# Altium PCB CANduino.PcbDoc
Units mm, origin at the board's own origin, x right, y up, seen from the top; angles counter-clockwise.
Board outline 43 x 30.5 mm, 4 copper layers (Top Layer, GND, PWR, Bottom Layer), stack 1.566 mm thick; 43 components, 51 nets, 212 pads, 142 vias.
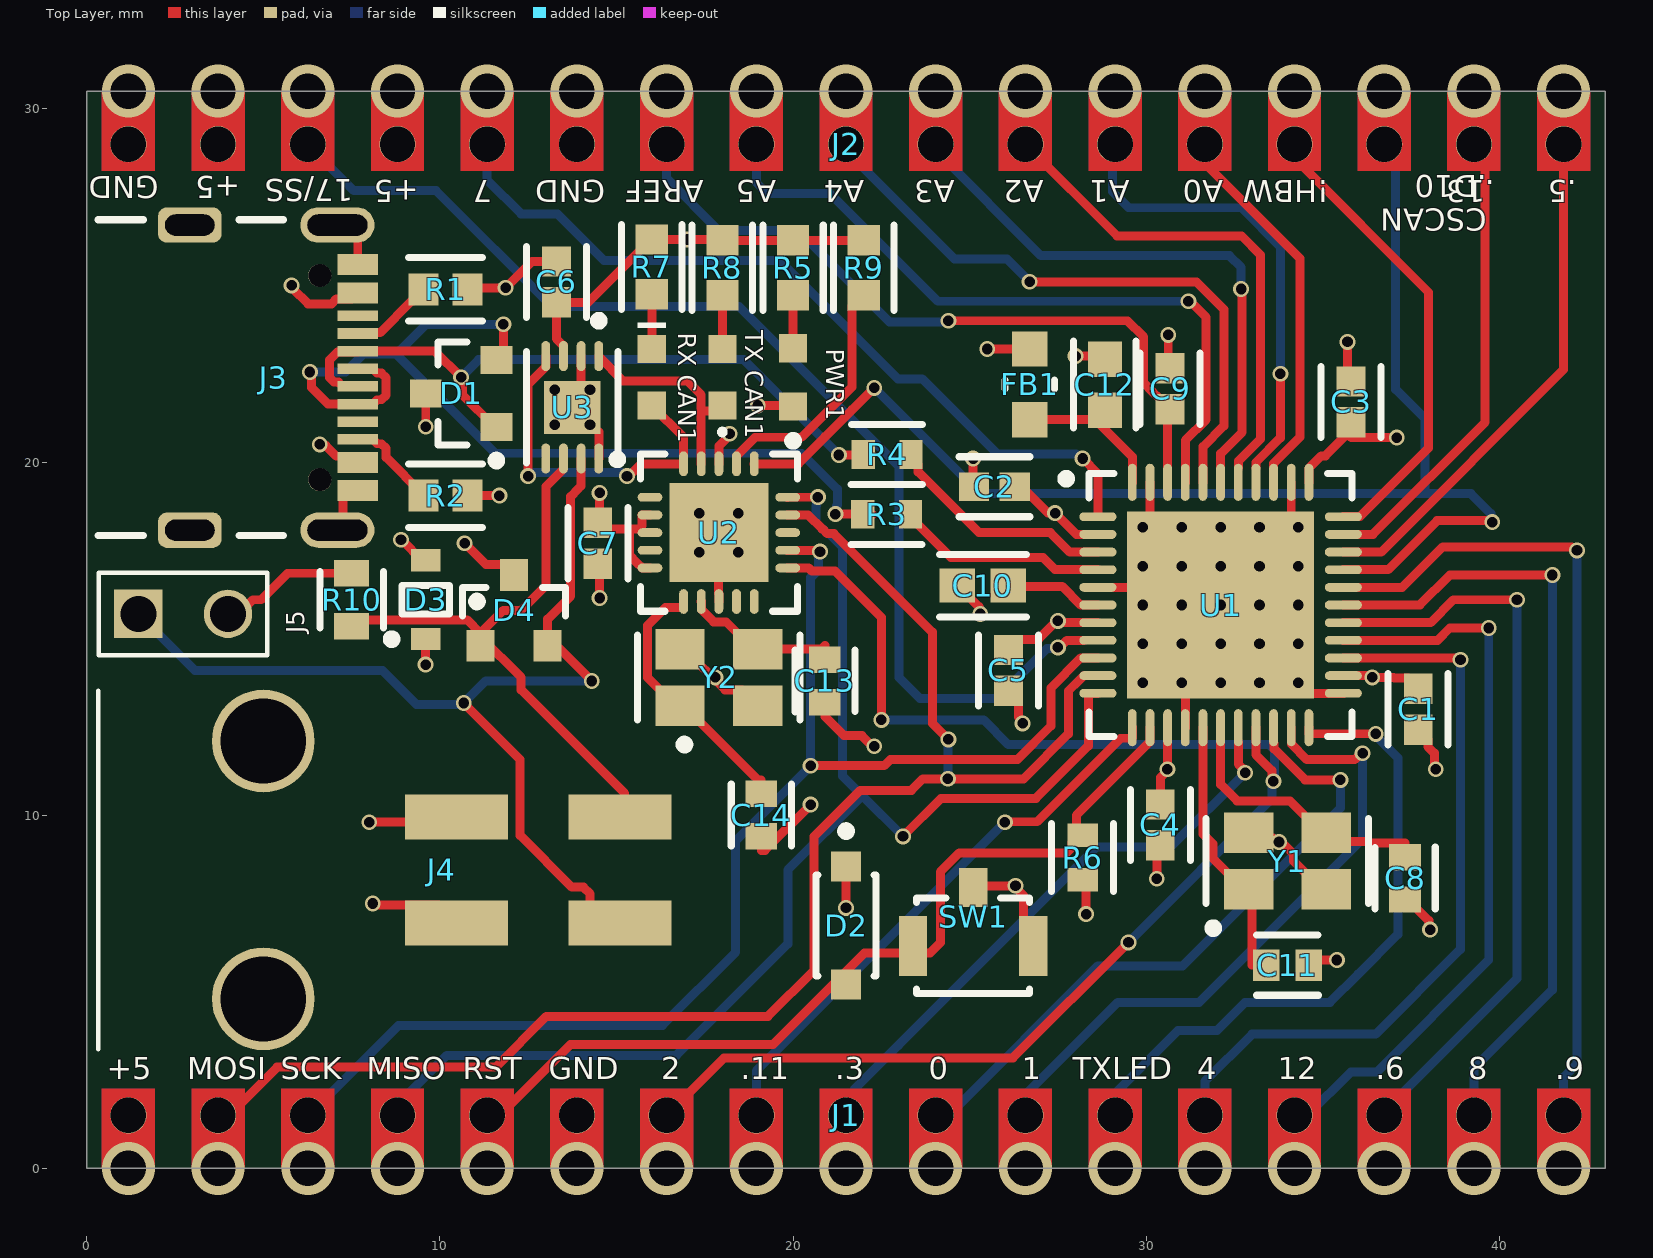
[diagram p0: Top Layer view]
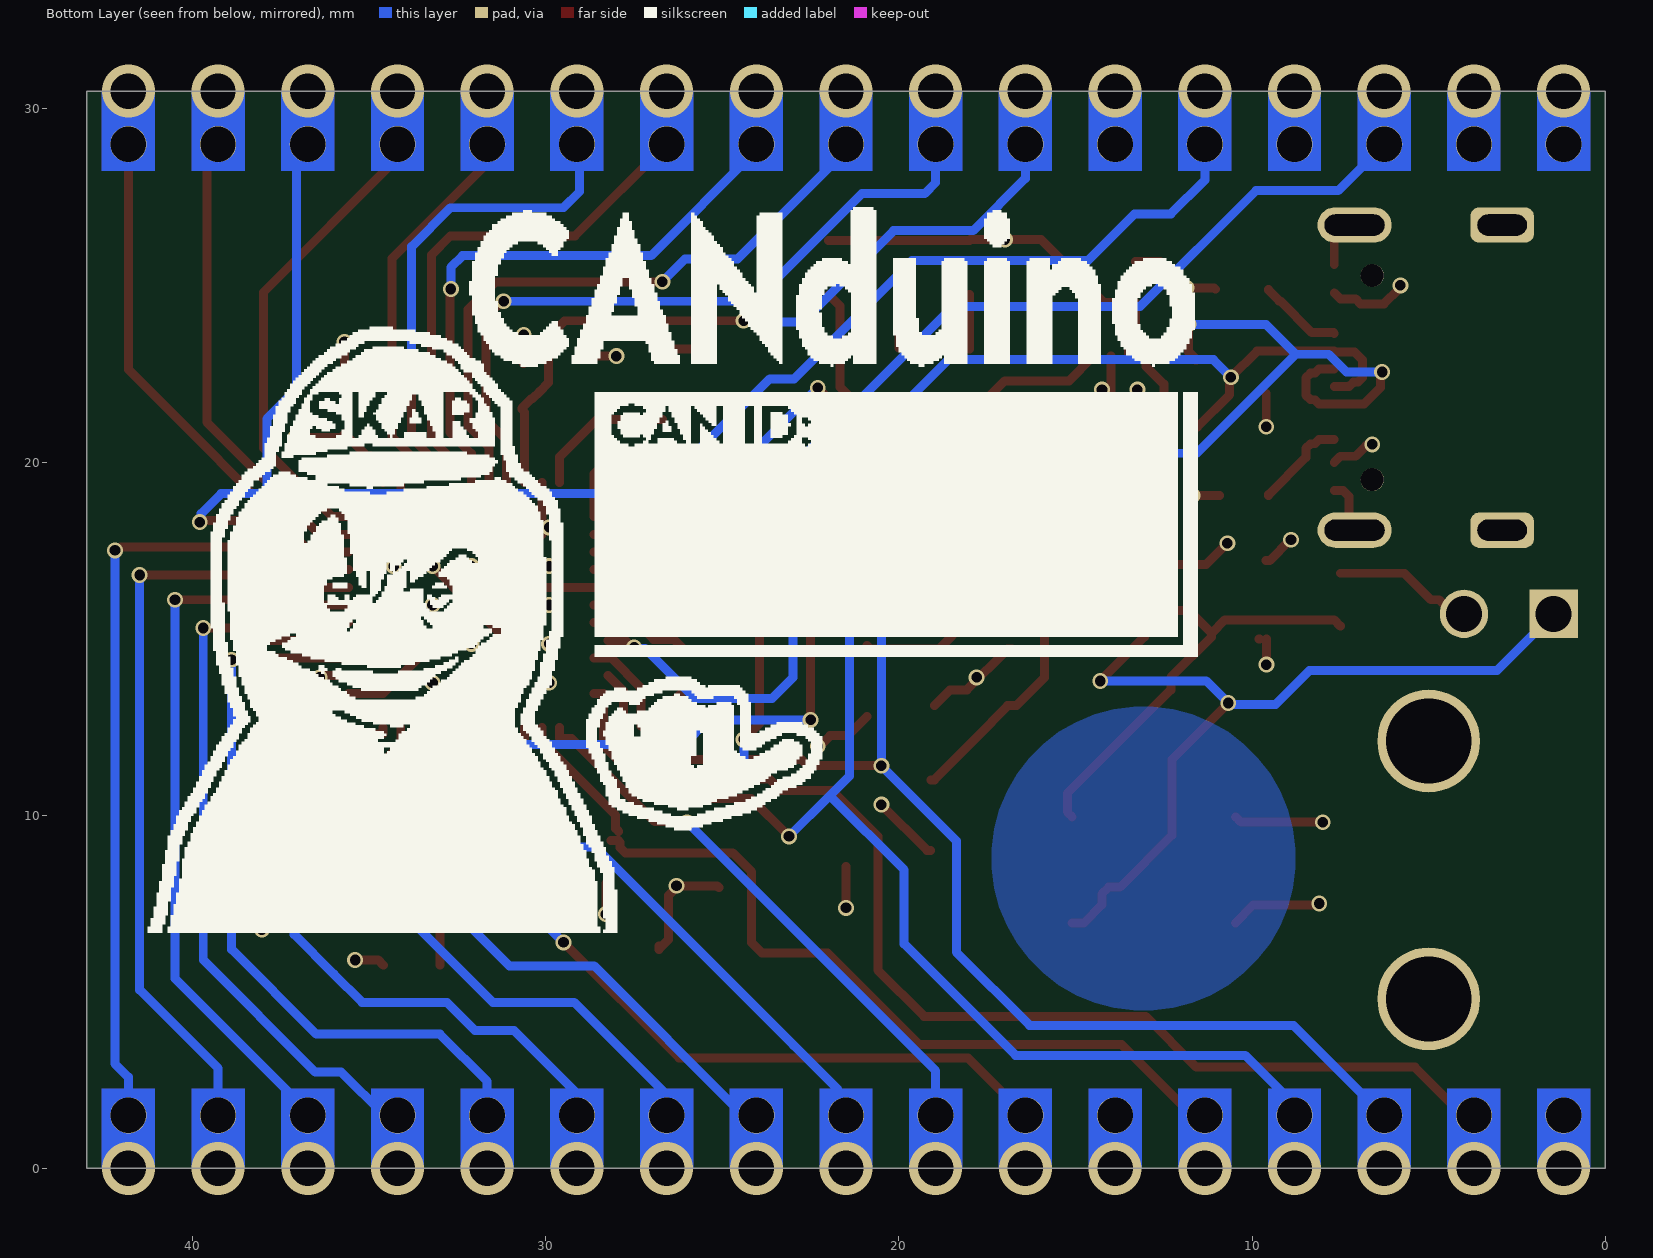
[diagram p1: Bottom Layer view, seen from below]
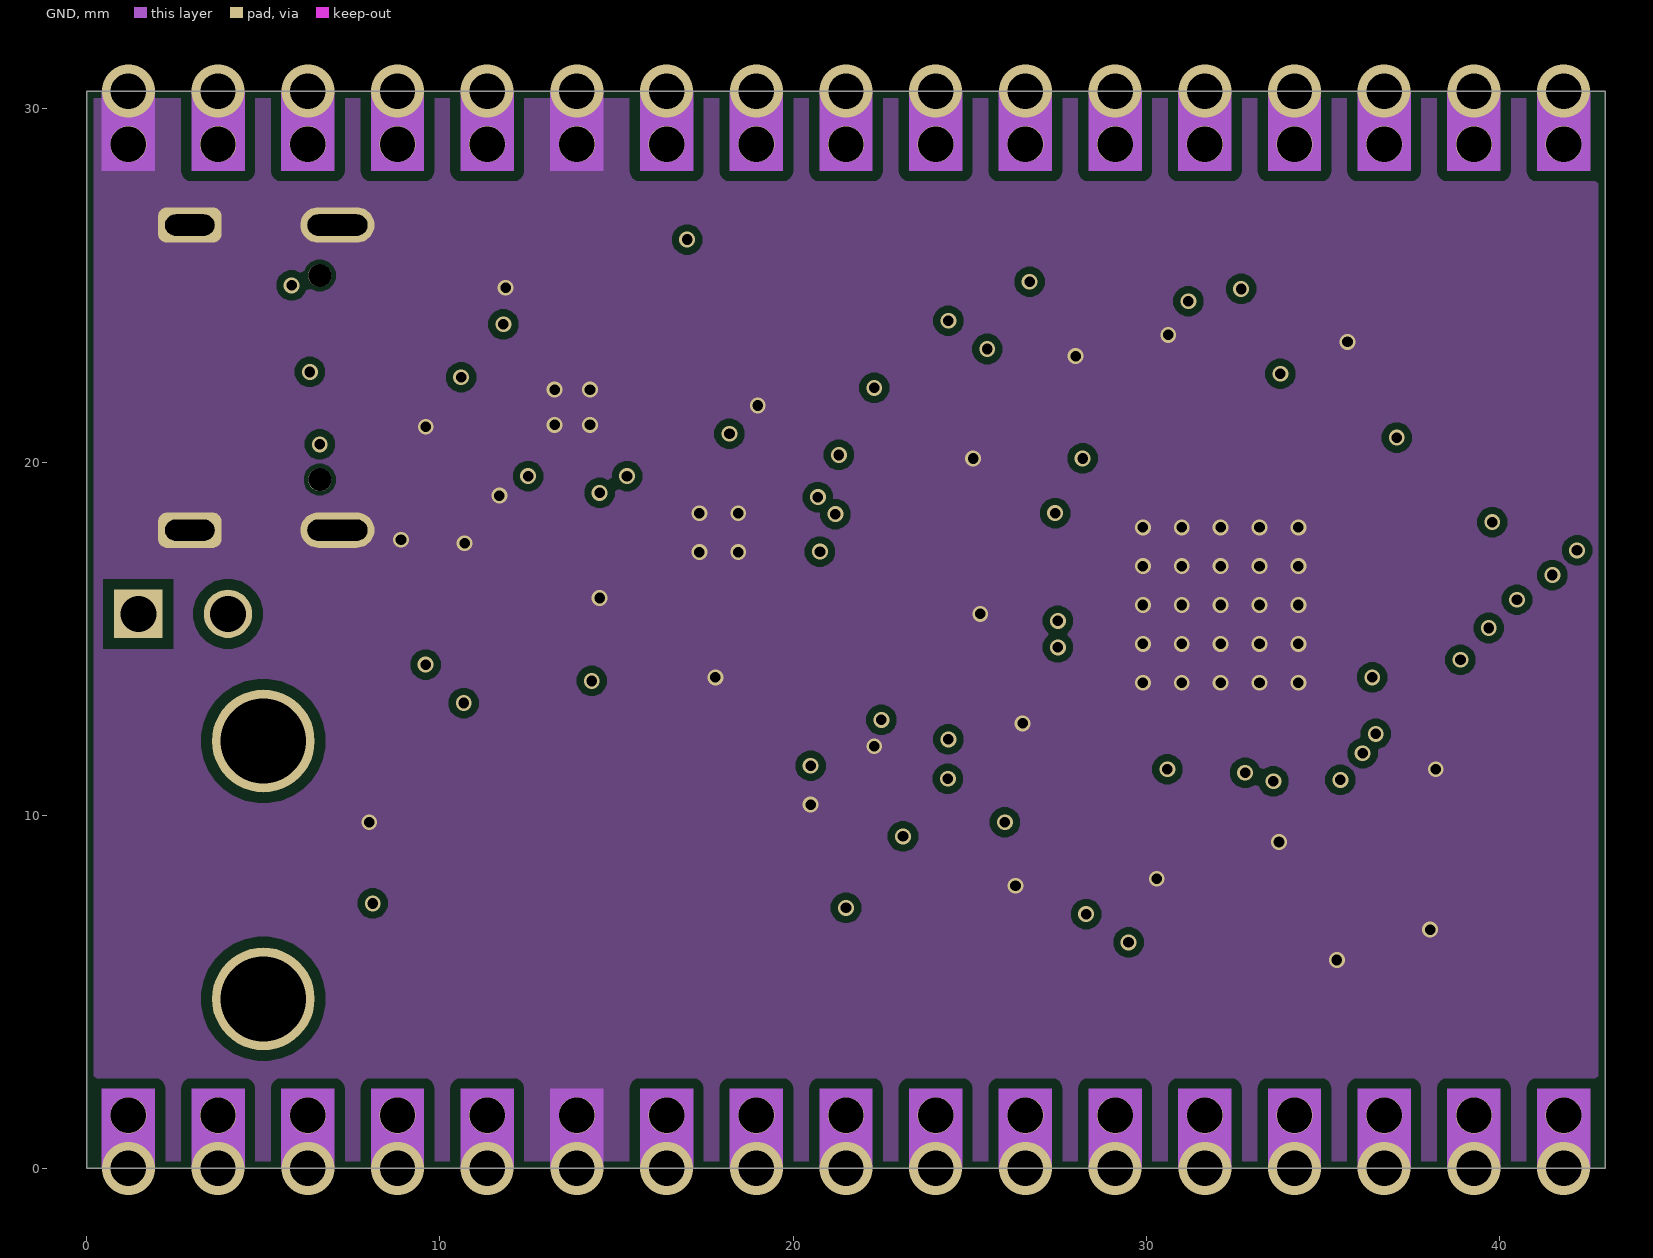
[diagram p2: GND]
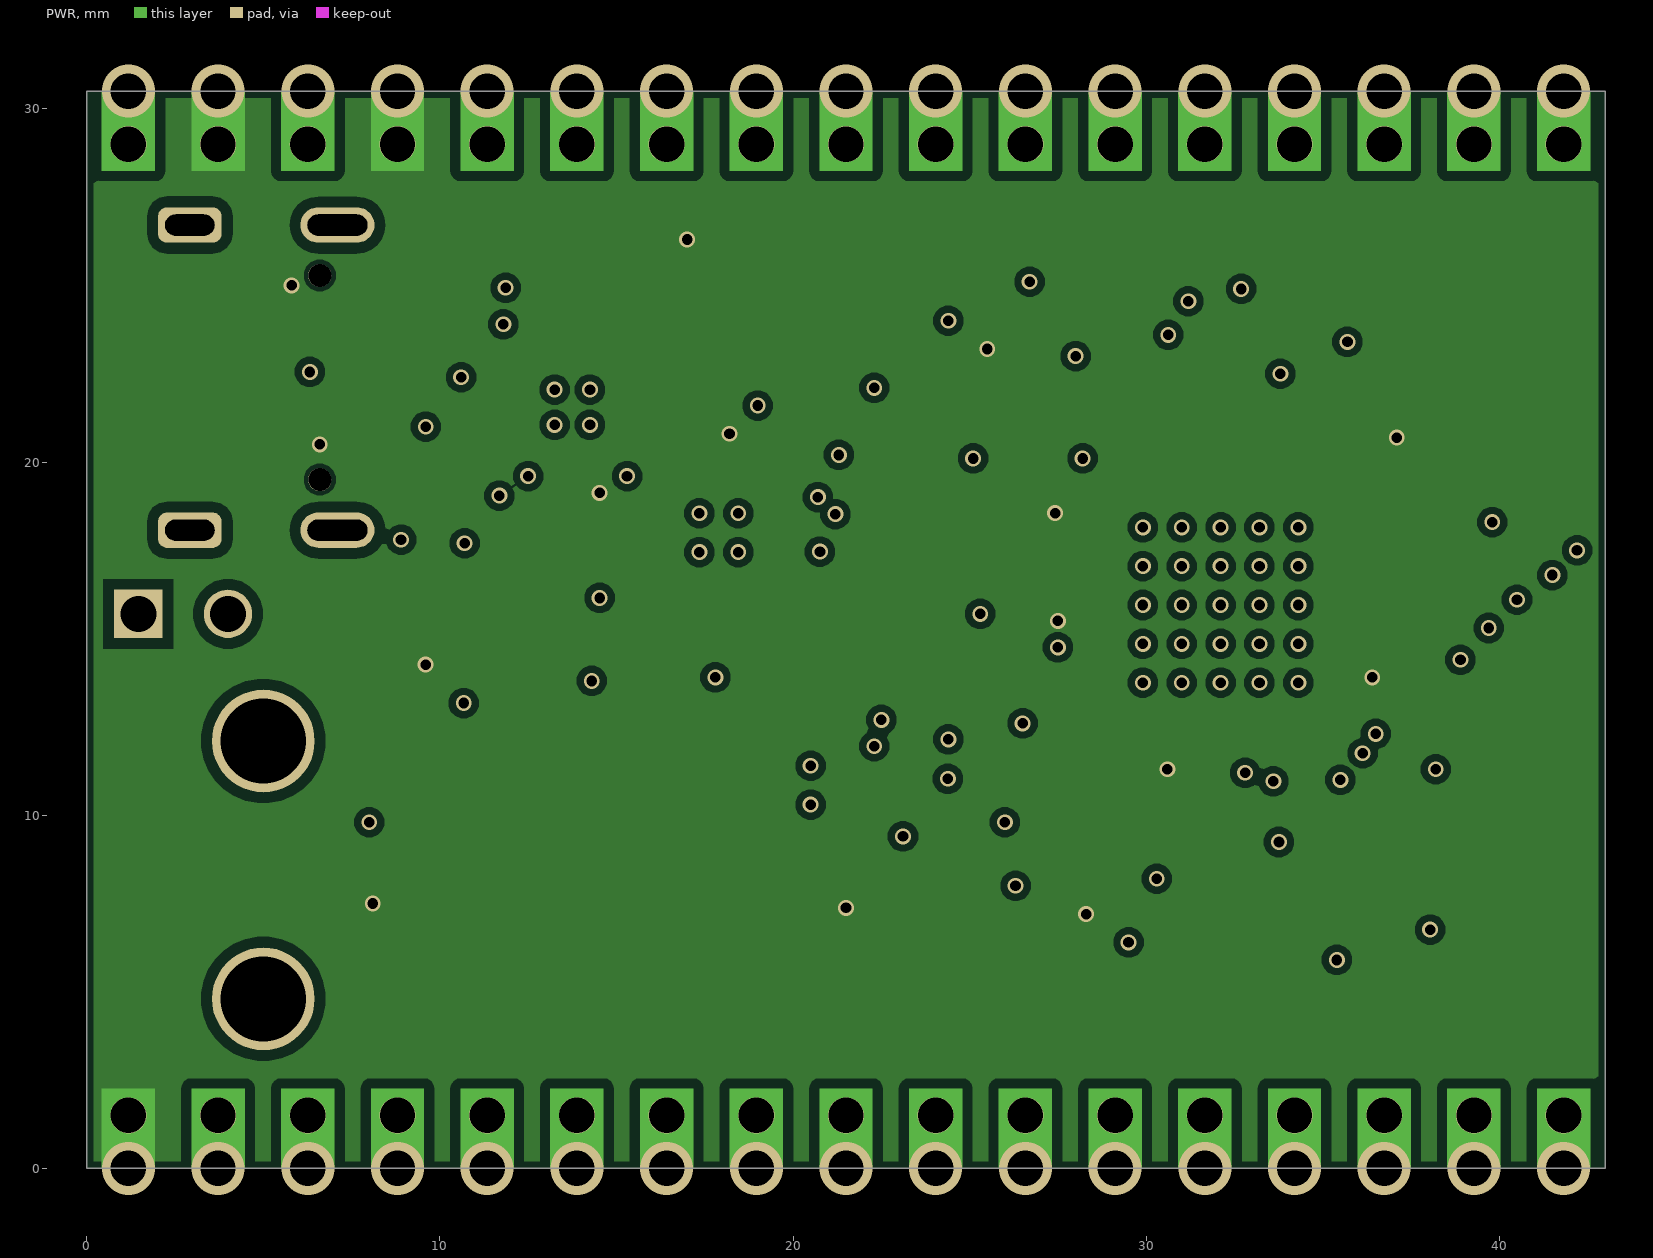
[diagram p3: PWR]
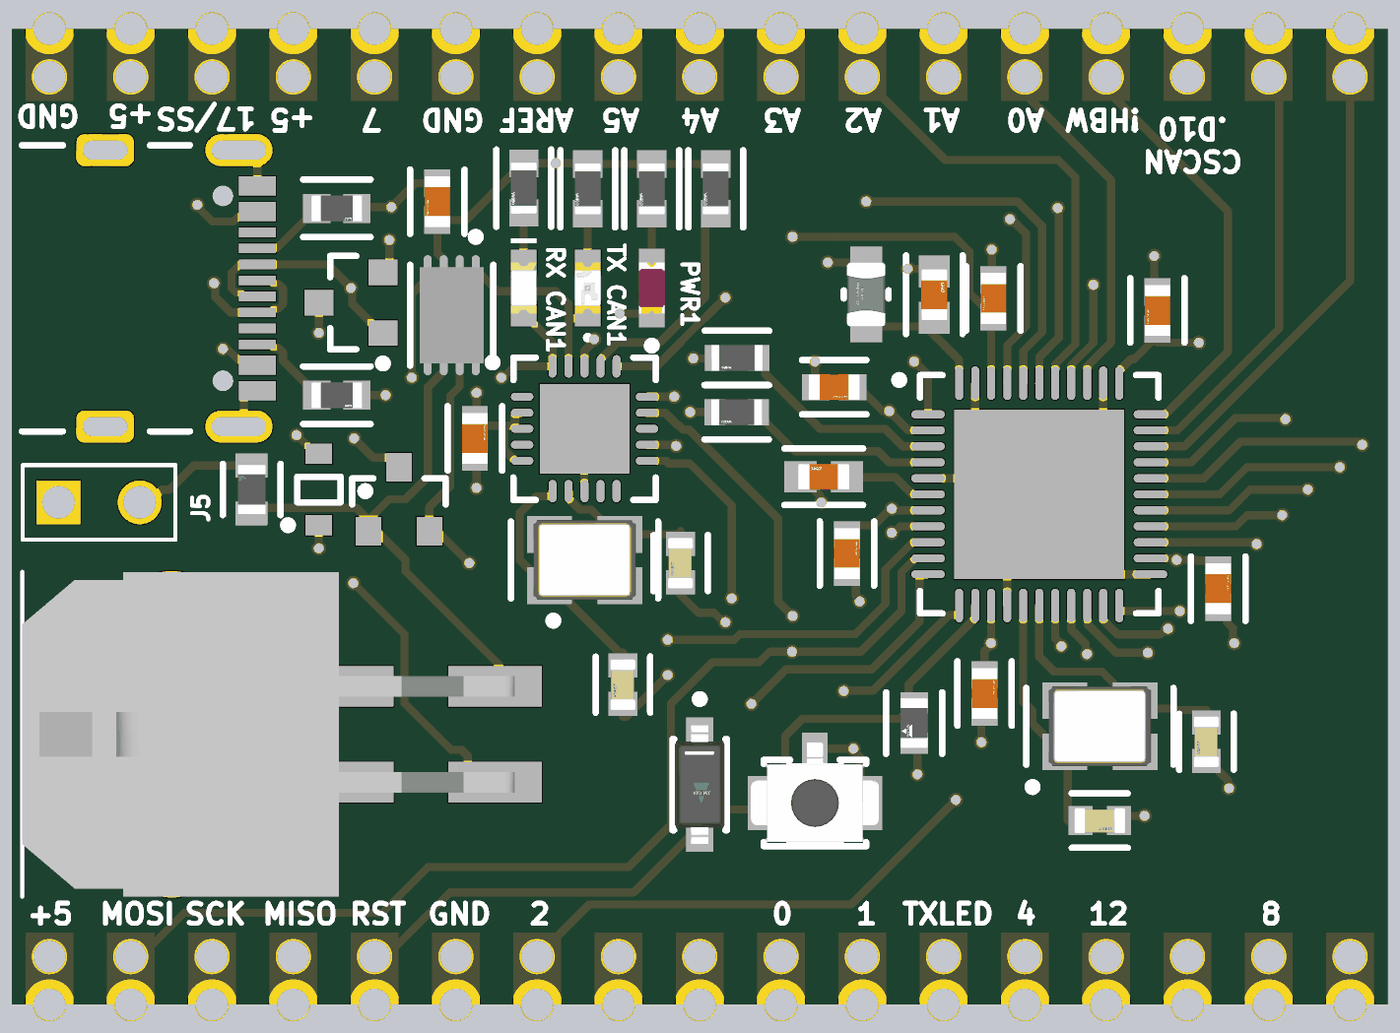
[diagram p4: 3D render of the assembled board from above, using the file's embedded part models]

## Layer stack, top to bottom
Top Solder: solder mask 0.0102, Solder Resist, Dk 3.5
Top Layer: signal copper 0.035
Dielectric 2: prepreg 0.203, PP-006, Dk 4.1
GND: signal copper 0.03
Dielectric 1: dielectric 1.03, FR-4, Dk 4.8
PWR: signal copper 0.03
Dielectric 3: prepreg 0.203, PP-006, Dk 4.1
Bottom Layer: signal copper 0.035
Bottom Solder: solder mask 0.0102, Solder Resist, Dk 3.5

## Board outline
0,0 0,30.5 43,30.5 43,0

## Design rules (kind name [scope] priority, off if disabled: settings)
BoardOutlineClearance [All] p1: gap=0.2 ignorepadtopadclearanceinfootprint=FALSE
Clearance [All] p1: gap=0.12 ignorepadtopadclearanceinfootprint=FALSE except(0.1: Arc-SMDPad Track-SMDPad; 0.15: SMDPad-SMDPad; 0.2: Arc-Via Track-Via Via-Fill Via-Poly Via-Region Via-Hole; 0.3: THPad-Fill THPad-Poly THPad-Region; 0.35: Arc-THPad Track-THPad)
ComponentClearance [All] p1: gap=0.01 collisioncheckmode=3 verticalgap=0.01 showdistances=FALSE
HoleSize [All] p1: absolutevalues=TRUE maxlimit=6.3 minlimit=0.15 maxpercent=80.000 minpercent=20.000
MinimumAnnularRing [All] p1: minimumring=0.025
MinimumSolderMaskSliver [All] p1: minsoldermaskwidth=0.1
PolygonConnect [All] p1: connectstyle=Direct reliefconductorwidth=0.254 reliefentries=4 polygonreliefangle="90 Angle" airgapwidth=0.254
RoutingVias [All] p1: holewidth=0.3 width=0.45 viastyle="Through Hole" minholewidth=0.15 minwidth=0.25 maxholewidth=1.5 maxwidth=2
SilkToSolderMaskClearance [IsPad] p1: minsilkscreentomaskgap=0.15 clearancetoexposedcopper=TRUE
SolderMaskExpansion [All] p1: expansion=0.038 istentingtop=FALSE
SupplyNets "Schematic Supply Nets_2" [InNet('GND')] p1: voltage=0.000
SupplyNets "Schematic Supply Nets" [InNet('+5')] p2: voltage=0.000
Width [All] p1: maxlimit=0.254 minlimit=0.16 preferedwidth=0.254 midlayer1_minwidth=0.254 midlayer2_minwidth=0.254 minimp=50.000000 maximp=50.000000 favimp=50.000000
26 further rules are at their usual default settings.

## Components (designator, comment, footprint, x,y, rotation, side; value= is the part's Value field where it differs from the comment)
C1 "100nF" FP-0603-L_1_6_0_1-W_0_8_0-IPC_C 37.7,13 r270 top
C2 "100nF" FP-0603-L_1_6_0_1-W_0_8_0-IPC_C 25.7,19.3 r180 top
C3 "100nF" FP-0603-L_1_6_0_1-W_0_8_0-IPC_C 35.8,21.7 r90 top
C4 "100nF" FP-0603-L_1_6_0_1-W_0_8_0-IPC_C 30.4,9.723 r270 top
C5 "100nF" FP-0603-L_1_6_0_1-W_0_8_0-IPC_C 26.1,14.1 r270 top
C6 "100nF" FP-0603-L_1_6_0_1-W_0_8_0-IPC_C 13.3,25.1 r90 top
C7 "100nF" FP-0603-L_1_6_0_1-W_0_8_0-IPC_C 14.475,17.7 r270 top
C8 "C0603C180K4HACTU" FP-C0603C-CF-MFG 37.332,8.212 r90 top value="18 pF"
C9 "100nF" FP-0603-L_1_6_0_1-W_0_8_0-IPC_C 30.675,22.075 r90 top
C10 "0603YD105KAT2A" FP-0603-L_1_6_0_15-W_0_81-IPC_B 25.374,16.5 r180 top
C11 "C0603C180K4HACTU" FP-C0603C-CF-MFG 34,5.75 r180 top value="18 pF"
C12 "0603YD105KAT2A" FP-0603-L_1_6_0_15-W_0_81-IPC_B 28.831,22.19 r90 top
C13 "C0603C180K4HACTU" FP-C0603C-CF-MFG 20.9,13.8 r90 top value="18 pF"
C14 "C0603C180K4HACTU" FP-C0603C-CF-MFG 19.1,10 r90 top value="18 pF"
D1 "SM05T1G" ONSC-SOT-23-3-318-08_V 10.601,21.941 r180 top
D2 "1N4148W-G3-08" FP-S8-V-3910_01-001-MFG 21.5,6.875 r270 top
D3 "SZMM3Z5V1T1G" ONSC-SOD-323-2-477-02_V 9.6,16.1 r90 top
D4 "SM05T1G" ONSC-SOT-23-3-318-08_V 12.1,15.8 r90 top
FB1 "MH2029-300Y" FP-MH2029-MFG 26.7,22.2 r270 top value=30Ω
J1 "CastellatedSocket" Castellatedsocket 41.82,0 r90 top
J2 "CastellatedSocket" Castellatedsocket 1.18,30.5 r270 top
J3 "USB4105GFA060" GCT_USB4105GFA060 2.92,22.39 r270 top
J4 "43045-0406" 43045-04YY_060708_1 12.785,8.45 r270 top
J5 "3-644456-2" TE_3-644456-2 1.46,15.7 r0 top
PWR1 "SML-D12V8WT86C" FP-SML-D12-MFG 20,22.4 r90 top
R1 "56k" FP-RR0816-IPC_C 10.16,24.892 r0 top
R2 "56K" FP-RR0816-IPC_C 10.16,19.05 r0 top
R3 "RC0603JR-0722RL" FP-RC0603-0_55-IPC_C 22.652,18.518 r180 top
R4 "RC0603JR-0722RL" FP-RC0603-0_55-IPC_C 22.665,20.215 r180 top
R5 "AC0603FR-071KL" FP-AC0603-IPC_B 20,25.5 r270 top
R6 "10k" FP-MCT0603-IPC_C 28.2,8.8 r270 top
R7 "AC0603FR-071KL" FP-AC0603-IPC_B 16,25.523 r270 top
R8 "AC0603FR-071KL" FP-AC0603-IPC_B 18,25.5 r270 top
R9 "AC0603FR-071KL" FP-AC0603-IPC_B 22,25.5 r270 top
R10 "120" FP-CRCW0603-e3-MFG 7.5,16.1 r90 top
"RX CAN1" "150060VS75003" WL-SMCW_0603_150060xx75003 16,22.4 r270 top
SW1 "B3U-1100PM" FP-B3U-1100PM-MFG 25.1,6.3 r180 top
"TX CAN1" "150060YS75020" WL-SMCW_0603_150060xx75020 18,22.4 r90 top
U1 "ATmega32U4-MU" 44PW_M 32.108,15.951 r0 top
U2 "MCP2515-I/ML" QFN-ML20_L 17.9,18 r0 top
U3 "MCP2544FDT-H/MNY" FP-C04-129-MNY-MFG 13.75,21.55 r270 top
Y1 "TSX-3225 16.0000MF18X-AC0" FP-TSX-3225-MFG 34,8.7 r0 top
Y2 "TSX-3225 16.0000MF18X-AC0" FP-TSX-3225-MFG 17.9,13.9 r0 top

## Footprints (in the part's own frame and the unit in brackets; to place one, negate y for a bottom-side part, rotate by r counter-clockwise, add the part's x,y. Pads: shape width x height; smd on the part's side, far side on the other; paste and mask are expansions set on the pad)
44PW_M [mm] "QFN, 44-Leads, Body 7x7mm, Pitch 0.5mm, Thermal Pad 5.3x5.3mm, IPC Low Density"
  oval 1.05x0.25 smd: 1(-3.475,2.5) 2(-3.475,2) 3(-3.475,1.5) 4(-3.475,1) 5(-3.475,0.5) 6(-3.475,0) 7(-3.475,-0.5) 8(-3.475,-1) 9(-3.475,-1.5) 10(-3.475,-2) 11(-3.475,-2.5) 23(3.475,-2.5) 24(3.475,-2) 25(3.475,-1.5) 26(3.475,-1) 27(3.475,-0.5) 28(3.475,0) 29(3.475,0.5) 30(3.475,1) 31(3.475,1.5) 32(3.475,2) 33(3.475,2.5)
  oval 0.25x1.05 smd: 12(-2.5,-3.475) 13(-2,-3.475) 14(-1.5,-3.475) 15(-1,-3.475) 16(-0.5,-3.475) 17(0,-3.475) 18(0.5,-3.475) 19(1,-3.475) 20(1.5,-3.475) 21(2,-3.475) 22(2.5,-3.475) 34(2.5,3.475) 35(2,3.475) 36(1.5,3.475) 37(1,3.475) 38(0.5,3.475) 39(0,3.475) 40(-0.5,3.475) 41(-1,3.475) 42(-1.5,3.475) 43(-2,3.475) 44(-2.5,3.475)
  rect 5.3x5.3 smd: 45(0,0)
  silkscreen extent -4.5,-3.73 3.73,3.73, body extent -3.57,-3.57 3.57,3.57, height 0.9
43045-04YY_060708_1 [mm]
  rect 1.27x2.92 smd: 1(1.5,-2.315) 2(-1.5,-2.315) 3(1.5,2.315) 4(-1.5,2.315)
  round 2.91 hole 2.41: 5(3.65,-7.785) 6(-3.65,-7.785)
  silkscreen extent -5.07,-12.45 5.07,-12.45, body extent -5.07,-12.46 5.07,2.93, height 8.69
Castellatedsocket [mm]
  round 1.025 hole 1: 1(1.5,0) 2(1.5,2.54) 3(1.5,5.08) 4(1.5,7.62) 5(1.5,10.16) 6(1.5,12.7) 7(1.5,15.24) 8(1.5,17.78) 9(1.5,20.32) 10(1.5,22.86) 11(1.5,25.4) 12(1.5,27.94) 13(1.5,30.48) 14(1.5,33.02) 15(1.5,35.56) 16(1.5,38.1) 17(1.5,40.64)
  Top Layer region: 2.25,39.89 1.5,39.89 0,39.89 0,39.89 0,41.39 2.25,41.39 2.25,41.39
  Top Layer region: 2.25,37.35 1.5,37.35 0,37.35 0,37.35 0,38.85 2.25,38.85 2.25,38.85
  Top Layer region: 2.25,34.81 1.5,34.81 0,34.81 0,34.81 0,36.31 2.25,36.31 2.25,36.31
  Top Layer region: 2.25,32.27 1.5,32.27 0,32.27 0,32.27 0,33.77 2.25,33.77 2.25,33.77
  Top Layer region: 2.25,29.73 1.5,29.73 0,29.73 0,29.73 0,31.23 2.25,31.23 2.25,31.23
  Top Layer region: 2.25,27.19 1.5,27.19 0,27.19 0,27.19 0,28.69 2.25,28.69 2.25,28.69
  Top Layer region: 2.25,24.65 1.5,24.65 0,24.65 0,24.65 0,26.15 2.25,26.15 2.25,26.15
  Top Layer region: 2.25,22.11 1.5,22.11 0,22.11 0,22.11 0,23.61 2.25,23.61 2.25,23.61
  Top Layer region: 2.25,19.57 1.5,19.57 0,19.57 0,19.57 0,21.07 2.25,21.07 2.25,21.07
  Top Layer region: 2.25,17.03 1.5,17.03 0,17.03 0,17.03 0,18.53 2.25,18.53 2.25,18.53
  Top Layer region: 2.25,14.49 1.5,14.49 0,14.49 0,14.49 0,15.99 2.25,15.99 2.25,15.99
  Top Layer region: 2.25,11.95 1.5,11.95 0,11.95 0,11.95 0,13.45 2.25,13.45 2.25,13.45
  Top Layer region: 2.25,9.41 1.5,9.41 0,9.41 0,9.41 0,10.91 2.25,10.91 2.25,10.91
  Top Layer region: 2.25,6.87 1.5,6.87 0,6.87 0,6.87 0,8.37 2.25,8.37 2.25,8.37
  Top Layer region: 2.25,4.33 1.5,4.33 0,4.33 0,4.33 0,5.83 2.25,5.83 2.25,5.83
  Top Layer region: 2.25,-0.75 1.5,-0.75 0,-0.75 0,-0.75 0,0.75 2.25,0.75 2.25,0.75
  Top Layer region: 2.25,1.79 1.5,1.79 0,1.79 0,1.79 0,3.29 2.25,3.29 2.25,3.29
  GND region: 2.25,39.89 1.5,39.89 0,39.89 0,39.89 0,41.39 2.25,41.39 2.25,41.39
  GND region: 2.25,37.35 1.5,37.35 0,37.35 0,37.35 0,38.85 2.25,38.85 2.25,38.85
  GND region: 2.25,34.81 1.5,34.81 0,34.81 0,34.81 0,36.31 2.25,36.31 2.25,36.31
  GND region: 2.25,32.27 1.5,32.27 0,32.27 0,32.27 0,33.77 2.25,33.77 2.25,33.77
  GND region: 2.25,29.73 1.5,29.73 0,29.73 0,29.73 0,31.23 2.25,31.23 2.25,31.23
  GND region: 2.25,27.19 1.5,27.19 0,27.19 0,27.19 0,28.69 2.25,28.69 2.25,28.69
  GND region: 2.25,24.65 1.5,24.65 0,24.65 0,24.65 0,26.15 2.25,26.15 2.25,26.15
  GND region: 2.25,22.11 1.5,22.11 0,22.11 0,22.11 0,23.61 2.25,23.61 2.25,23.61
  GND region: 2.25,19.57 1.5,19.57 0,19.57 0,19.57 0,21.07 2.25,21.07 2.25,21.07
  GND region: 2.25,17.03 1.5,17.03 0,17.03 0,17.03 0,18.53 2.25,18.53 2.25,18.53
  GND region: 2.25,14.49 1.5,14.49 0,14.49 0,14.49 0,15.99 2.25,15.99 2.25,15.99
  GND region: 2.25,11.95 1.5,11.95 0,11.95 0,11.95 0,13.45 2.25,13.45 2.25,13.45
  GND region: 2.25,9.41 1.5,9.41 0,9.41 0,9.41 0,10.91 2.25,10.91 2.25,10.91
  GND region: 2.25,6.87 1.5,6.87 0,6.87 0,6.87 0,8.37 2.25,8.37 2.25,8.37
  GND region: 2.25,4.33 1.5,4.33 0,4.33 0,4.33 0,5.83 2.25,5.83 2.25,5.83
  GND region: 2.25,-0.75 1.5,-0.75 0,-0.75 0,-0.75 0,0.75 2.25,0.75 2.25,0.75
  GND region: 2.25,1.79 1.5,1.79 0,1.79 0,1.79 0,3.29 2.25,3.29 2.25,3.29
  PWR region: 2.25,39.89 1.5,39.89 0,39.89 0,39.89 0,41.39 2.25,41.39 2.25,41.39
  PWR region: 2.25,37.35 1.5,37.35 0,37.35 0,37.35 0,38.85 2.25,38.85 2.25,38.85
  PWR region: 2.25,34.81 1.5,34.81 0,34.81 0,34.81 0,36.31 2.25,36.31 2.25,36.31
  PWR region: 2.25,32.27 1.5,32.27 0,32.27 0,32.27 0,33.77 2.25,33.77 2.25,33.77
  PWR region: 2.25,29.73 1.5,29.73 0,29.73 0,29.73 0,31.23 2.25,31.23 2.25,31.23
  PWR region: 2.25,27.19 1.5,27.19 0,27.19 0,27.19 0,28.69 2.25,28.69 2.25,28.69
  PWR region: 2.25,24.65 1.5,24.65 0,24.65 0,24.65 0,26.15 2.25,26.15 2.25,26.15
  PWR region: 2.25,22.11 1.5,22.11 0,22.11 0,22.11 0,23.61 2.25,23.61 2.25,23.61
  PWR region: 2.25,19.57 1.5,19.57 0,19.57 0,19.57 0,21.07 2.25,21.07 2.25,21.07
  PWR region: 2.25,17.03 1.5,17.03 0,17.03 0,17.03 0,18.53 2.25,18.53 2.25,18.53
  PWR region: 2.25,14.49 1.5,14.49 0,14.49 0,14.49 0,15.99 2.25,15.99 2.25,15.99
  PWR region: 2.25,11.95 1.5,11.95 0,11.95 0,11.95 0,13.45 2.25,13.45 2.25,13.45
  PWR region: 2.25,9.41 1.5,9.41 0,9.41 0,9.41 0,10.91 2.25,10.91 2.25,10.91
  PWR region: 2.25,6.87 1.5,6.87 0,6.87 0,6.87 0,8.37 2.25,8.37 2.25,8.37
  PWR region: 2.25,4.33 1.5,4.33 0,4.33 0,4.33 0,5.83 2.25,5.83 2.25,5.83
  PWR region: 2.25,-0.75 1.5,-0.75 0,-0.75 0,-0.75 0,0.75 2.25,0.75 2.25,0.75
  PWR region: 2.25,1.79 1.5,1.79 0,1.79 0,1.79 0,3.29 2.25,3.29 2.25,3.29
  Bottom Layer region: 2.25,39.89 1.5,39.89 0,39.89 0,39.89 0,41.39 2.25,41.39 2.25,41.39
  Bottom Layer region: 2.25,37.35 1.5,37.35 0,37.35 0,37.35 0,38.85 2.25,38.85 2.25,38.85
  Bottom Layer region: 2.25,34.81 1.5,34.81 0,34.81 0,34.81 0,36.31 2.25,36.31 2.25,36.31
  Bottom Layer region: 2.25,32.27 1.5,32.27 0,32.27 0,32.27 0,33.77 2.25,33.77 2.25,33.77
  Bottom Layer region: 2.25,29.73 1.5,29.73 0,29.73 0,29.73 0,31.23 2.25,31.23 2.25,31.23
  Bottom Layer region: 2.25,27.19 1.5,27.19 0,27.19 0,27.19 0,28.69 2.25,28.69 2.25,28.69
  Bottom Layer region: 2.25,24.65 1.5,24.65 0,24.65 0,24.65 0,26.15 2.25,26.15 2.25,26.15
  Bottom Layer region: 2.25,22.11 1.5,22.11 0,22.11 0,22.11 0,23.61 2.25,23.61 2.25,23.61
  Bottom Layer region: 2.25,19.57 1.5,19.57 0,19.57 0,19.57 0,21.07 2.25,21.07 2.25,21.07
  Bottom Layer region: 2.25,17.03 1.5,17.03 0,17.03 0,17.03 0,18.53 2.25,18.53 2.25,18.53
  Bottom Layer region: 2.25,14.49 1.5,14.49 0,14.49 0,14.49 0,15.99 2.25,15.99 2.25,15.99
  Bottom Layer region: 2.25,11.95 1.5,11.95 0,11.95 0,11.95 0,13.45 2.25,13.45 2.25,13.45
  Bottom Layer region: 2.25,9.41 1.5,9.41 0,9.41 0,9.41 0,10.91 2.25,10.91 2.25,10.91
  Bottom Layer region: 2.25,6.87 1.5,6.87 0,6.87 0,6.87 0,8.37 2.25,8.37 2.25,8.37
  Bottom Layer region: 2.25,4.33 1.5,4.33 0,4.33 0,4.33 0,5.83 2.25,5.83 2.25,5.83
  Bottom Layer region: 2.25,-0.75 1.5,-0.75 0,-0.75 0,-0.75 0,0.75 2.25,0.75 2.25,0.75
  Bottom Layer region: 2.25,1.79 1.5,1.79 0,1.79 0,1.79 0,3.29 2.25,3.29 2.25,3.29
FP-0603-L_1_6_0_1-W_0_8_0-IPC_C [mm]
  rect 0.858x0.812 smd paste+0 mask+0: 1(-0.577,0) 2(0.577,0)
  silkscreen extent -1.01,-0.85 1.01,0.85, body extent -1.11,-0.55 1.11,0.55, height 0.25
FP-0603-L_1_6_0_15-W_0_81-IPC_B [mm]
  rect 1.007x0.968 smd paste+0 mask+0: 1(-0.726,0) 2(0.726,0)
  silkscreen extent -1.23,-0.88 1.23,0.88, body extent -1.48,-0.73 1.48,0.73, height 0.25
FP-AC0603-IPC_B [mm]
  rect 0.859x0.912 smd paste+0 mask+0: 1(-0.777,0) 2(0.777,0)
  silkscreen extent -1.21,-0.86 1.21,0.86, body extent -1.46,-0.71 1.46,0.71, height 0.25
FP-B3U-1100PM-MFG [mm]
  rect 0.8x1.7 smd paste+0 mask+0: 1(1.7,0) 2(-1.7,0)
  rect 0.8x1.1 smd paste+0 mask+0: 3(0,-1.65)
  silkscreen extent -1.6,-1.35 1.6,1.35, body extent -2.2,-2.3 2.2,1.45, height 0.25
FP-C04-129-MNY-MFG [mm]
  rrect100% 0.85x0.25 smd paste+0 mask+0: 1(-1.45,0.75) 2(-1.45,0.25) 3(-1.45,-0.25) 4(-1.45,-0.75) 5(1.45,-0.75) 6(1.45,-0.25) 7(1.45,0.25) 8(1.45,0.75)
  rect 1.5x1.6 smd paste+0 mask+0: 9(0,0)
  silkscreen extent -2.57,-1.3 1.58,1.3, body extent -1.97,-1.18 1.97,1.17, height 0.25
FP-C0603C-CF-MFG [mm]
  rect 0.75x0.9 smd paste+0 mask+0: 1(-0.6,0) 2(0.6,0)
  silkscreen extent -0.87,-0.85 0.88,0.85, body extent -1.2,-0.6 1.2,0.6, height 0.25
FP-CRCW0603-e3-MFG [mm]
  rect 0.75x1 smd paste+0 mask+0: 1(-0.75,0) 2(0.75,0)
  silkscreen extent -0.8,-0.9 0.8,0.9, body extent -1.22,-0.6 1.22,0.6, height 0.25
FP-MCT0603-IPC_C [mm]
  rect 0.664x0.862 smd paste+0 mask+0: 1(-0.629,0) 2(0.629,0)
  silkscreen extent -0.96,-0.87 0.96,0.87, body extent -1.06,-0.58 1.06,0.58, height 0.25
FP-MH2029-MFG [mm]
  rect 1x1 smd paste+0 mask+0: 1(-1,0) 2(1,0)
  silkscreen extent -0.13,-0.7 0.13,0.7, body extent -1.6,-0.8 1.6,0.8, height 0.25
FP-RC0603-0_55-IPC_C [mm]
  rect 0.659x0.812 smd paste+0 mask+0: 1(-0.677,0) 2(0.677,0)
  silkscreen extent -1.01,-0.85 1.01,0.85, body extent -1.11,-0.55 1.11,0.55, height 0.25
FP-RR0816-IPC_C [mm]
  rect 0.855x0.906 smd paste+0 mask+0: 1(-0.626,0) 2(0.626,0)
  silkscreen extent -1.05,-0.9 1.05,0.9, body extent -1.15,-0.6 1.15,0.6, height 0.25
FP-S8-V-3910_01-001-MFG [mm]
  rect 0.85x0.85 smd paste+0 mask+0: 1(-1.675,0) 2(1.675,0)
  silkscreen extent -2.8,-0.85 1.43,0.85, body extent -2.2,-0.95 2.2,0.95, height 0.25
FP-SML-D12-MFG [mm]
  rect 0.8x0.8 smd paste+0 mask+0: 1(-0.825,0) 2(0.825,0)
  silkscreen extent -1.92,-0.13 -1.68,0.12, body extent -1.33,-0.55 1.33,0.55, height 0.25
FP-TSX-3225-MFG [mm]
  rect 1.4x1.15 smd paste+0 mask+0: 1(-1.1,-0.8) 2(1.1,-0.8) 3(1.1,0.8) 4(-1.1,0.8)
  silkscreen extent -2.3,-2.02 2.3,1.2, body extent -1.9,-1.48 1.9,1.48, height 0.25
GCT_USB4105GFA060 [mm]
  rect 0.6x1.15 smd: A1_B12(-3.2,4.755) A4_B9(-2.4,4.755) B1_A12(3.2,4.755) B4_A9(2.4,4.755)
  rect 0.3x1.15 smd: A5(-1.25,4.755) A6(-0.25,4.755) A7(0.25,4.755) A8(1.25,4.755) B5(1.75,4.755) B6(0.75,4.755) B7(-0.75,4.755) B8(-1.75,4.755)
  oval 1x2.1 hole 0.6 slot 1.7 at 90 deg: SH1(-4.32,4.18) SH2(4.32,4.18)
  rrect50% 1x1.8 hole 0.6 slot 1.4 at 90 deg: SH3(-4.32,0) SH4(4.32,0)
  round 0.65 hole 0.65 unplated mask+0: ""(-2.89,3.68) ""(2.89,3.68)
  silkscreen extent -4.47,-2.6 4.47,2.65
ONSC-SOD-323-2-477-02_V [mm] "SOD, 2-Leads, Body 1.7x1.25mm"
  rect 0.63x0.83 smd: 1(-1.115,0) 2(1.115,0)
  silkscreen extent -1.24,-0.67 0.4,1.09, body extent -0.85,-0.63 0.85,0.63, height 1.06
ONSC-SOT-23-3-318-08_V [mm] "SOT23, 3-Leads, Body 2.92x1.3mm, Pitch 0.95mm"
  rect 0.9x0.8 smd: 1(-1,0.95) 2(-1,-0.95) 3(1,0)
  silkscreen extent -1.13,-1.46 0.65,2.02, body extent -0.65,-1.46 0.65,1.46, height 1.11
QFN-ML20_L [mm] "QFN, 20-Leads, Body 4x4mm, Pitch 0.5mm, Thermal Pad 2.8x2.8mm, IPC High Density"
  oval 0.7x0.25 smd: 1(-1.95,1) 2(-1.95,0.5) 3(-1.95,0) 4(-1.95,-0.5) 5(-1.95,-1) 11(1.95,-1) 12(1.95,-0.5) 13(1.95,0) 14(1.95,0.5) 15(1.95,1)
  oval 0.25x0.7 smd: 6(-1,-1.95) 7(-0.5,-1.95) 8(0,-1.95) 9(0.5,-1.95) 10(1,-1.95) 16(1,1.95) 17(0.5,1.95) 18(0,1.95) 19(-0.5,1.95) 20(-1,1.95)
  rect 2.8x2.8 smd: 21(0,0)
  silkscreen extent -3,-2.22 2.23,2.23, body extent -2.07,-2.07 2.08,2.08, height 1
TE_3-644456-2 [mm]
  rect 1.37x1.37 hole 1.02: 1(0,0)
  round 1.37 hole 1.02: 2(2.54,0)
  silkscreen extent -1.12,-1.17 3.66,1.17
WL-SMCW_0603_150060xx75003 [mm] "SMD Mono-color Chip LED, body 1.6x0.8mm"
  rect 0.8x0.8 smd: 1(-0.8,0) 2(0.8,0)
  silkscreen extent -1.55,-0.4 -1.4,0.4, body extent -0.8,-0.4 0.8,0.4, height 0.7
WL-SMCW_0603_150060xx75020 [mm] "SMD Mono-color Chip LED, body 1.6x0.8mm"
  rect 0.8x0.8 smd: 1(-0.8,0) 2(0.8,0)
  silkscreen extent -1.62,-0.08 -1.48,0.07, body extent -0.8,-0.4 0.8,0.4, height 0.25

## Part data
C1 C2 C3 C4 C5 C6 C7 C9: library part CMP-14477-000532-2, "None", Case Code (Imperial)=0603, Case Code (Metric)=1608, Dielectric=X5R, Max Operating Temperature=85°C, Min Operating Temperature=-55°C, Package Quantity=4000, Ratings=AEC-Q200, Tolerance=10%, Voltage Rating=50V, Capacitance=100nF, Case/Package=0603, Halogen Free="Halogen Free", Height=0.8mm, Lead Free="Lead Free", Length=0.063inch, Mount="Surface Mount", Packaging="Tape and Reel", RoHS Compliant=Yes, Termination=SMD/SMT, Thickness=0.035inch, Voltage Rating (DC)=50V, Width=0.031inch
C8 C11 C13 C14: library part CMP-03020-027993-1, "C0603 18 pF X8R 30ppm/°C 10.00% 16 V", Capacitance="18 pF", Manufacturer=KEMET, Package=C0603C-CF, Temperature="-55°C to +125°C", Temperature Characteristic=X8R, Temperature Coefficient=30ppm/°C, Temperature Range High=+125°C, Temperature Range Low=-55°C, Tolerance=0.1, Voltage Rating="16 V", Automotive=Yes, Automotive Grade="Grade 1", Category=Cap, ComponentLink2Description=Datasheet, ComponentLink2URL=https://api.kemet.com/component-edge/download/datasheet/C0603C100J5GACAUTO.pdf, Device Class L1="Passive Components", Device Class L2=Capacitors, Device Class L3="Ceramic Capacitors", Height=0.87mm, Lead Free=Yes, Manufacturer Part Number=C0603C180K4HACTU, Material=Ceramic, Octopart=https://octopart.com/c0603c180k4hactu-kemet-88725221, RoHS=TRUE
C10 C12: library part CMP-2006-04532-2, "General Purpose Ceramic Capacitor, 0603, 1uF, 10%, X5R, 15%, 16V", Capacitance=1uF, Case Code (Imperial)=0603, Case Code (Metric)=1608, Dielectric=X5R, Insulation Resistance=10GR, Max Operating Temperature=85°C, Min Operating Temperature=-55°C, Package Quantity=1, Tolerance=10%, Voltage=16V, Case/Package=0603, Construction=Flat, Depth=0.81mm, Dissipation Factor=12.5%, Height=0.9mm, Lead Free="Lead Free", Length=1.6mm, Mount="Surface Mount", Number of Pins=2, Packaging="Tape and Reel", Radiation Hardening=No, REACH SVHC="No SVHC", RoHS Compliant=Yes, Series=-, Termination=SMD/SMT, Thickness=0.035inch, Voltage Rating=16V, Voltage Rating (DC)=16V, Width=0.81mm
D1 D4: library part CMP-1061-00666-1, "Transient Voltage Suppressor Diode Array, Dual Common Anode Diodes for ESD Protection, 3-Pin SOT-23, Pb-Free, Tape and Reel", Manufacturer="On Semiconductor", ComponentLink1Description="Manufacturer URL", ComponentLink1URL=http://www.onsemi.com/, ComponentLink2Description=Datasheet, ComponentLink2URL=http://www.onsemi.com/pub_link/Collateral/SM12T1-D.PDF, ComponentLink3Description="Package Specification", ComponentLink3URL=http://www.onsemi.cn/pub_link/Collateral/318-08.PDF, DatasheetVersion="Rev. 6", Direction=Unidirectional, IR Max (uA)=10, Mounting Technology="Surface Mount", PackageDescription="3-Pin Small Outline Transistor, Body 2.92 x 1.3 mm, Pitch 0.95 mm", PackageReference=SOT-23-3-318-08, PackageVersion="Rev. AP, 11/2009", Packing="Tape and Reel", PartNumber=SM05T1G, PPK Max (W)=300, RoHS=Pb-Free
D2: library part CMP-00030-46456310-1, "1N4148W-G3-08 Rectifier Diode, 1 Phase, 1 Element, 0.15A, 100V V(RRM), Silicon", Average Rectified Current=150mA, Case/Package=SOD, Forward Voltage=1.2V, Max Operating Temperature=150°C, Max Repetitive Reverse Voltage (Vrrm)=100V, Max Reverse Voltage (DC)=75V, Min Operating Temperature=-55°C, Peak Non-Repetitive Surge Current=500mA, Contact Plating=Tin, Element Configuration=Single, Forward Current=150mA, Mount="Surface Mount", NexarPartId=46456310, Number of Pins=2, Reverse Recovery Time=4ns, RoHS=Compliant, Schedule B="8541100070, 8541100070", Weight=9.412042mg
D3: library part CMP-1060-00693-1, "Zener Voltage Regulator, 300 mW, 2-Pin SOD-323, Pb-Free, Tape and Reel", Manufacturer="On Semiconductor", ComponentLink1Description="Manufacturer URL", ComponentLink1URL=http://www.onsemi.com/, ComponentLink2Description=Datasheet, ComponentLink2URL=http://www.onsemi.cn/pub_link/Collateral/MM3Z2V4T1-D.PDF, ComponentLink3Description="Package Specification", ComponentLink3URL=http://www.onsemi.com/pub_link/Collateral/477-02.PDF.1, DatasheetVersion="Rev. 9", Mounting Technology="Surface Mount", P Max (W)=0.3, PackageDescription="2-Pin SOD, Body 1.7 x 1.25 mm", PackageReference=SOD-323-2-477-02, PackageVersion="Rev. H, 03/2007", Packing="Tape and Reel", PartNumber=SZMM3Z5V1T1G, RoHS=Pb-Free, VZ Typ (V)=5.1
FB1: library part CMP-07252-000001-1, "FERRITE BEAD 30 OHM 0805 1LN", Impedance At Frequency="30Ω @ 100MHz", Manufacturer=Bourns, Package=MH2029, Resistance=30Ω, Rms Current=3A, Series Resistance=25mΩ, Temperature="-55°C to +125°C", Temperature Range High=+125°C, Temperature Range Low=-55°C, Tolerance=25%, Automotive=No, Category=FBead, ComponentLink2Description=Datasheet, ComponentLink2URL=https://www.bourns.com/docs/Product-Datasheets/mh.pdf, Core Material=Ferrite, Device Class L1="Passive Components", Device Class L2="EMI / RFI Components", Device Class L3="Ferrite Beads and Chips", Digikey Description="FERRITE BEAD 30 OHM 0805 1LN", Height=1.1mm, Ipc Land Pattern Name=CAPC200120X90, Lead Free=Yes, Manufacturer Part Number=MH2029-300Y, Mouser Description="Ferrite Beads 30 ohms 25% HIGH CURRENT", Octopart=https://octopart.com/mh2029-300y-bourns-756929, RoHS=TRUE
J3: library part CMP-003-000000-1, Package=None, Availability=Unavailable, Component Type=Standard, Design Item ID=USB4105GFA060, MF="{'manufacturer': u'GCT'}", MP=USB4105GFA060, Pin Count=16, Price=None, Source=USB4105GFA060.SchLib
J4: "Connector", Manufacturer_Name=Molex, Mouser Part Number=538-43045-0406, Datasheet Link=https://www.molex.com/pdm_docs/sd/430450206_sd.pdf, Height=8.77mm, Manufacturer_Part_Number=43045-0406, Mouser Price/Stock=https://www.mouser.co.uk/ProductDetail/Molex/43045-0406?qs=UeCeOHRHQeYGnc4y0X6gLg%3D%3D
J5: library part CMP-002-00074-1, "Connector Unshrouded Header HDR 2 Position 2.54mm Solder Straight Thru-Hole", Case/Package=None, Centerline_Pitch="2.54 mm[.1 in]", Component Type=Standard, Design Item ID=3-644456-2, Digi-Key_Part_Number=A31112-ND, Digi-Key_Purchase_URL=https://www.digikey.com/product-detail/en/te-connectivity-amp-connectors/3-644456-2/A31112-ND/698344?utm_source=snapeda&utm_medium=aggregator&utm_campaign=symbol, EU_RoHS_Compliance=Compliant, MF="TE Connectivity", MP=3-644456-2, Number_of_Positions=2, Pins=2, Product_Type=Connector, SnapEDA_Link=https://www.snapeda.com/parts/3-644456-2/TE%20Connectivity%20AMP%20Connectors/view-part/520887/?ref=snap, Source=SnapEDAsch.SchLib, TE_purchase_URL=https://www.te.com/usa-en/product-3-644456-2.html?te_bu=Cor&te_type=disp&te_campaign=seda_glo_cor-seda-global-disp-prtnr-fy19-seda-model-bom-cta_sma-317_1&elqCampaignId=32493
PWR1: library part CMP-08952-000027-1, "LED RED 1608 SMD", Case Code (Imperial)=0603, Case Code (Metric)=1608, Color=Red, Forward Voltage=2.2V, Lens Color=White, Test Current=20mA, Case/Package=0603, Dominant Wavelength=630nm, Height=0.65mm, Length=1.6mm, Lens Size=0.8mm, Lens Style=Flat, Luminous Intensity=40mcd, Mount="Surface Mount", Packaging="Tape and Reel", Width=0.8mm
R1 R2: library part CMP-2000-02705-2, "56kΩ ±0.5% 0.0625W 1/16W Chip Resistor 0603 (1608 Metric) Thin Film", Case Code (Imperial)=0603, Case Code (Metric)=1608, Max Operating Temperature=125°C, Max Power Dissipation=63mW, Min Operating Temperature=-55°C, Package Quantity=1, Power Rating=62.5mW, Resistance=56kR, Resistance Tolerance=0.5%, Resistor Type="Thin Film", Temperature Coefficient=25ppm/°C, Voltage Rating=75V, Case/Package=0603, Depth=0.8mm, Height=0.4mm, Lead Free="Lead Free", Length=1.6mm, Number of Pins=2, Number of Terminations=2, Packaging="Tape and Reel", RoHS Compliant=Yes, Series=RR, Technology="THIN FILM", Termination=SMD/SMT, Tolerance=0.5%, Voltage Rating (DC)=75V, Width=0.031inch
R3 R4: library part CMP-03412-037819-1, "RES SMD 22 OHM 5% 1/10W 0603", Case Code (Imperial)=0603, Case Code (Metric)=1608, Max Operating Temperature=155°C, Max Power Dissipation=100mW, Min Operating Temperature=-55°C, Resistance=22R, Resistance Tolerance=5%, Resistor Type="Thick Film", Temperature Coefficient=100ppm/°C, Voltage Rating=50V, Case/Package=0603, Construction=Rectangular, Depth=0.8mm, Features="Moisture Resistant", Lead Free="Lead Free", Length=1.6mm, Military Standard=Not, Number of Pins=2, Number of Terminations=2, Packaging="Tape and Reel", Power Rating=100mW, REACH SVHC="No SVHC", RoHS Compliant=Yes, Series=RC, Size Code=0603, Termination=SMD/SMT, Tolerance=5%, Voltage Rating (DC)=50V, Width=0.8mm
R5 R7 R8 R9: library part CMP-2000-04828-3, "RES 1kΩ 1.00% 0.1W 0603", Case Code (Imperial)=0603, Case Code (Metric)=1608, Max Operating Temperature=155°C, Max Power Dissipation=100mW, Min Operating Temperature=-55°C, Package Quantity=1, Ratings=AEC-Q200, Resistance=1kR, Resistor Type="Thick Film", Temperature Coefficient=100ppm/°C, Tolerance=1%, Voltage Rating=50V, Case/Package=0603, Construction=Rectangular, Depth=0.8mm, Features="Moisture Resistant", Height=0.022inch, Lead Free="Lead Free", Length=0.063inch, Military Standard=Not, Number of Terminations=2, Packaging="Tape and Reel", Power Rating=100mW, RoHS Compliant=Yes, Series=AC, Size Code=0603, Termination=SMD/SMT, Width=0.031inch
R6: library part CMP-02407-000418-1, "RES SMD 100 OHM 1% 1/8W 0603", Case Code (Imperial)=0603, Case Code (Metric)=1608, Max Operating Temperature=125°C, Max Power Dissipation=125mW, Min Operating Temperature=-55°C, Package Quantity=1, Power Rating=100mW, Resistance=10kR, Temperature Coefficient=50ppm/°C, Tolerance=1%, Voltage Rating=75V, Case/Package=0603, Composition="Thin Film", Contact Plating=Tin, Depth=0.85mm, Height=0.022inch, Lead Free="Lead Free", Length=1.55mm, Military Standard=Not, Mount="Surface Mount", Number of Terminations=2, Packaging="Tape and Reel", Radiation Hardening=No, Voltage Rating (DC)=75V, Width=0.8mm
R10: library part CMP-1666-00020-3, "RES Thick Film, 120Ω, 1%, 0.1W, 100ppm/°C, 0603", Case Code (Imperial)=0603, Case Code (Metric)=1608, Max Operating Temperature=155°C, Max Power Dissipation=100mW, Min Operating Temperature=-55°C, Package Quantity=10, Resistance=120R, Resistance Tolerance=1%, Resistor Type="Thick Film", Temperature Coefficient=100ppm/°C, Voltage Rating=75V, Case/Package=0603, Construction=Rectangular, Contact Plating=Tin, Depth=0.85mm, Features="Automotive AEC-Q200", Height=0.45mm, Lead Free="Lead Free", Length=1.55mm, Military Standard=Not, Mount="Surface Mount", Number of Terminations=2, Packaging="Tape and Reel", Power Rating=100mW, Radiation Hardening=No, RoHS Compliant=Yes, Series=CRCW, Technology="THICK FILM", Termination=SMD/SMT, Tolerance=1%, Voltage Rating (DC)=75V, Weight=7.1E-05oz, Width=0.033inch, Working Voltage=75V
"RX CAN1": library part CMP-03913-126098672-2, "Led, Bright Green, 100Mcd, 572Nm Rohs Compliant: Yes", Forward Current=100mA, Forward Voltage=2V, Max Operating Temperature=100°C, Max Reverse Voltage (DC)=5V, Min Operating Temperature=-40°C, Dominant Wavelength=567nm, Height=700µm, Length=1.6mm, Luminous Intensity=100mcd, Peak Wavelength=572nm, RoHS=Compliant, Viewing Angle=140°, Width=800µm
SW1: library part CMP-08834-000028-1, "SWITCH TACTILE SPST-NO 0.05A 12V", Case/Package=SMD/SMT, Contact Resistance=100mR, Current Rating=50mA, Max Operating Temperature=70°C, Max Voltage Rating (DC)=12V, Min Operating Temperature=-25°C, Operating Force=1.5N, Package Quantity=1000, Ratings="Dust Proof", Actuator Length=0.4mm, Actuator Type=Standard, Connector Type=SMD/SMT, Electrical Life=200000Cycles, Illumination Type=Non-Illuminated, Mechanical Life=200000Cycles, Mount="Surface Mount", Orientation=Straight, Packaging="Tape and Reel", REACH SVHC="No SVHC", RoHS Compliant=Yes, Series=B3U, Switch Function=Off-Mom, Switch Travel=0.15mm, Termination=SMD/SMT, Throw Configuration=SPST, Voltage Rating (DC)=12V, Weight=0.022g
"TX CAN1": library part CMP-03913-104891429-2, "WL-SMCW SMT Mono-Color Chip LED Waterclear super f", Forward Current=60mA, Forward Voltage=2V, Max Operating Temperature=85°C, Max Reverse Voltage (DC)=5V, Min Operating Temperature=-40°C, Dominant Wavelength=590nm, Height=250µm, Length=1.6mm, Luminous Intensity=130mcd, Peak Wavelength=595nm, RoHS=Compliant, Viewing Angle=140°, Width=800µm
U1: library part CMP-0095-00166-2, "8-bit AVR Microcontroller, 2.7-5.5V, 16MHz, 32KB Flash, 1KB EEPROM, 2.5KB SRAM, USB Controller, 44-pin QFN, Industrial Grade (-40°C to 85°C), Ext Osc", Code_JEDEC=MO-220-VKKD-1, ComponentLink1Description="Manufacturer URL", ComponentLink1URL=http://www.atmel.com/, ComponentLink2Description="ATmega16U4/32U4 Datasheet", ComponentLink2URL=http://www.atmel.com/dyn/resources/prod_documents/doc7766.pdf, ComponentLink3Description="ATmega16U4 ATmega32U4 Summary", ComponentLink3URL=http://www.atmel.com/dyn/resources/prod_documents/7766S.pdf, DatasheetVersion="revF, Nov-2010", PackageDescription="44-Pin Quad Flat No-Lead Package, 7 x 7 mm Body, 0.5 mm Pitch (QFN)", PackageReference=44PW, PackageVersion="revG, Sep-2009", RevisionNote="DatasheetVersion, PackageVersion & PCB updated. URLs added."
U2: library part CMP-0186-00187-1, "Stand-Alone CAN Controller With SPI Interface, 20-Pin QFN, Industrial Temperature", ComponentLink1Description="Manufacturer URL", ComponentLink1URL=http://www.microchip.com/, ComponentLink2Description=Datasheet, ComponentLink2URL=http://ww1.microchip.com/downloads/en/DeviceDoc/21801F.pdf, ComponentLink3Description="Package Specification", ComponentLink3URL=http://www.microchip.com/stellent/groups/techpub_sg/documents/packagingspec/en012702.pdf, DatasheetVersion="revF, Oct-2010", PackageDescription="20-Lead Plastic Quad Flat, No Lead Package (ML) - 4x4x0.9 mm Body [QFN]", PackageReference=QFN-ML20, PackageVersion="revBB, Aug-2009"
U3: library part CMP-06279-000073-1, "IC TRANSCEIVER 1/1 8TDFN", Max Operating Temperature=150°C, Min Operating Temperature=-40°C, Data Rate=8Mbps, Mount="Surface Mount", Packaging="Cut Tape", Receiver Hysteresis=200mV, RoHS Compliant=Yes, Series=-
Y1 Y2: library part CMP-36405-000005-1, "CRYSTAL 16.00 MHZ 9PF SMD", Frequency=16MHz, Load Capacitance=9pF, Manufacturer=EPSON, Package=TSX-3225, Temperature="-40°C to +85°C", Temperature Range High=+85°C, Temperature Range Low=-40°C, Tolerance=10ppm, Automotive=No, Category=Crys, ComponentLink2Description=Datasheet, ComponentLink2URL=https://support.epson.biz/td/api/doc_check.php?dl=brief_TSX-3225&lang=en, Device Class L1="Passive Components", Device Class L2="Crystals / Oscillators", Device Class L3=Crystals, Digikey Description="CRYSTAL 16.00 MHZ 9PF SMD", Esr=60Ω, Height=0.6mm, Lead Free=Yes, Manufacturer Part Number="TSX-3225 16.0000MF18X-AC0", Mouser Description="CRYSTAL 16.00 MHZ 9PF SMD", Octopart=https://octopart.com/tsx-3225+16.0000mf18x-ac0-epson-58756552, RoHS=TRUE, Series=TSX-3225, Stability=18ppm

## Via types
v1: diameter 0.45, hole 0.3, Top Layer to Bottom Layer, tented both sides, 108 vias
v2: diameter 1.5, hole 1, Top Layer to Bottom Layer, 34 vias

## Nets (pads, with @x,y where several pads share a name; then routed paths per layer and width w, separated by ;. In a path a pad name is that pad's centre, name@x,y a point inside that pad or via, vN(x,y) a via of type N, cw(c..) or ccw(c..) an arc to the next point about the centre after c; other vN are vias at no path point)
+5: C1.1 C2.1 C3.1 C4.1 C5.1 C6.1 C7.1 D2.1 D3.1 FB1.1 J1.17 J2.2 J2.4 J3.A4_B9 J3.B4_A9 J4.1 R5.1 R6.2 R7.1 R8.1 R9.1 U1.2 U1.7 U1.14 U1.24 U1.34 U2.2 U2.3 U2.5 U2.18 U3.3 | length 39.6
  Top Layer w0.254: v1(5.8,25) 5.838,24.962 5.838,24.908 6.268,24.478 6.932,24.478 7.071,24.617 7.502,24.617 J3.A4_B9 ; v1(6.6,20.5) 6.638,20.462 6.772,20.462 7.071,20.163 7.502,20.163 J3.B4_A9 ; v1(8.1,7.5) 8.153,7.5 8.195,7.458 9.962,7.458 J4.1 ; v1(9.597,14.264) D3.1@9.597,14.982 ; D3.1@9.797,14.982 D3.1@9.8,14.985 ; U3.3 13.5,23.296 13.3,23.496 C6.1 14.196,24.523 15.973,26.3 17.977,26.3 R8.1 R5.1 R9.1 ; v1(14.525,19.125) 14.525,18.327 C7.1 14.652,18.1 15.387,18.1 ; U2.5 15.729,17 15.581,17.148 15.579,17.148 15.373,17.354 15.373,18.086 15.387,18.1 ; U2.2 15.729,18.5 15.727,18.498 15.727,18.198 15.629,18.1 15.387,18.1 ; U2.18 17.902,19.952 17.902,20.449 18.2,20.747 v1(18.2,20.8) ; v1(21.5,7.375) D2.1 ; v1(25.5,23.2) FB1.1 ; C5.1 26.1,14.7 26.379,14.979 26.948,14.979 27.469,15.5 v1(27.5,15.5) 27.553,15.5 27.602,15.451 U1.7 ; C2.1@26.6,19.2 26.6,19.175 27.223,18.552 v1(27.421,18.552) 28.02,17.953 28.631,17.953 U1.2 ; R6.2 28.3,8.071 v1(28.3,7.2) ; C4.1@30.4,10.6 30.4,11.061 30.6,11.261 v1(30.6,11.3) 30.606,11.306 30.606,12.078 30.608,12.08 U1.14 ; U1.34 34.608,19.822 34.963,20.177 35.077,20.177 35.7,20.8 35.808,20.692 v1(37.095,20.692) ; U1.24 35.585,13.949 36.298,13.949 v1@36.347,13.9 ; v1(36.4,13.9) v1@36.347,13.9 ; C1.1 37.7,13.6 37.421,13.879 37.027,13.879 37.006,13.9 v1@36.347,13.9
  other v1: 17,26.3
  other v2: 1.18,0 3.72,30.5 8.8,30.5
AREF: C9.1 J2.7 U1.42 | length 20.7
  Top Layer w0.254: v1(24.4,24) 29.467,24 29.925,23.542 29.925,22.246 30.175,21.996 30.177,21.996 30.373,21.8 30.396,21.8 30.675,21.521 C9.1 ; U1.42 C9.1@30.608,21.4
  Bottom Layer w0.254: J2.7 16.42,28.03 17.9,26.55 20.15,26.55 22.738,23.962 24.362,23.962 v1(24.4,24)
  other v2: 16.42,30.5
CSCAN: J2.15 U1.30 U2.16 | length 38.7
  Top Layer w0.254: U2.16 20.15,19.95 20.911,20.711 20.911,20.722 21.673,21.484 21.684,21.484 v1(22.3,22.1) ; U1.30 36.851,16.951 38.238,18.338 39.762,18.338 v1(39.8,18.3)
  Bottom Layer w0.254: v1(22.3,22.1) 25.296,19.104 37.804,19.104 ; J2.15@36.895,29 36.911,29 37.06,28.851 37.06,22.059 37.9,21.219 37.9,19.2 37.804,19.104 ; v1(39.8,18.3) 39.762,18.338 39.762,18.538 39.196,19.104 37.9,19.104 37.804,19.104
  other v2: 36.74,30.5
D2/SDA/CAN_INT: J1.11 U1.19 U2.11 | length 43.1
  Top Layer w0.254: v2(16.42,0) J1.11 18.046,3.126 26.226,3.126 v1(29.5,6.4) ; U2.11 20.444,17 20.535,16.91 21.19,16.91 22.5,15.6 v1(22.5,12.7) ; U1.19 33.108,11.717 33.562,11.263 33.562,10.997 v1(33.6,10.959)
  Bottom Layer w0.254: v1(22.5,12.7) 25.4,12.7 26.1,12 33.483,12 33.632,11.851 33.632,10.991 v1(33.6,10.959) ; v1(29.5,6.4) 33.562,10.462 33.562,10.869 33.626,10.932 v1@33.632,10.932
D3/SCL: J1.9 U1.18 | length 16.5
  Top Layer w0.254: U1.18@32.608,12.078 32.608,11.755 32.608,11.445 32.8,11.253 v1(32.8,11.2)
  Bottom Layer w0.254: J1.9@21.855,1.5 21.723,1.632 21.723,2.223 22.983,3.483 28.6,9.1 30.7,9.1 v1(32.8,11.2)
  other v2: 21.5,0
D4/A6: J1.5 U1.25 | length 21.4
  Top Layer w0.254: U1.25 U1.25 38.795,14.452 38.847,14.4 v1(38.9,14.4)
  Bottom Layer w0.254: J1.5 31.66,2.46 33,3.8 36.5,3.8 38.9,6.2 v1(38.9,14.4) ; J1.5@31.919,1.596 J1.5@32.015,1.5
  other v2: 31.66,0
D5: J2.17 U1.31 | length 14.8
  Top Layer w0.254: U1.31 36.651,17.451 41.82,22.62 J2.17
  other v2: 41.82,30.5
D6/A7: J1.3 U1.27 | length 21
  Top Layer w0.254: U1.27 35.585,15.453 38.053,15.453 38.7,16.1 v1(40.5,16.1)
  Bottom Layer w0.254: J1.3@37.01,1.585 J1.3@37.095,1.5 ; J1.3@37.01,1.879 40.5,5.369 v1(40.5,16.1)
  other v2: 36.74,0
D7: J2.5 U1.1 | length 23
  Top Layer w0.254: v1(28.2,20.1) 28.633,19.667 U1.1
  Bottom Layer w0.254: J2.5 11.34,27.985 12.3,27.025 13.325,27.025 14.65,25.7 19.625,25.7 22.972,22.353 23.659,22.353 25.781,20.231 28.016,20.231 28.147,20.1 v1(28.2,20.1)
  other v2: 11.34,30.5
D8/A8: J1.2 U1.28 | length 22.5
  Top Layer w0.254: U1.28 35.585,15.953 37.753,15.953 38.6,16.8 v1(41.5,16.8)
  Bottom Layer w0.254: J1.2 39.28,2.83 41.5,5.05 v1(41.5,16.8)
  other v2: 39.28,0
D9/A9: J1.1 U1.29 | length 23.3
  Top Layer w0.254: U1.29 37.251,16.451 38.4,17.6 42.047,17.6 42.147,17.5 v1(42.2,17.5)
  Bottom Layer w0.254: J1.1 41.82,2.581 42.2,2.961 v1(42.2,17.5)
  other v2: 41.82,0
D11: J1.10 U1.12 | length 16.1
  Top Layer w0.254: v1(26,9.8) 26.013,9.813 26.913,9.813 29.278,12.178 29.606,12.178 29.608,12.18 U1.12
  Bottom Layer w0.254: J1.10 18.96,2.76 v1(26,9.8)
  other v2: 18.96,0
D12/A11: J1.4 U1.26 | length 21
  Top Layer w0.254: U1.26 38.251,14.951 38.6,15.3 v1(39.7,15.3)
  Bottom Layer w0.254: J1.4 34.565,1.5 35.792,2.727 36.527,2.727 39.7,5.9 v1(39.7,15.3)
  other v2: 34.2,0
D13: J2.16 U1.32 | length 13.3
  Top Layer w0.254: U1.32 35.585,17.953 36.421,17.953 39.6,21.132 39.6,28.851 39.451,29 J2.16@39.435,29
  other v2: 39.28,30.5
D18/A0: J2.13 U1.36 | length 10.7
  Top Layer w0.254: J2.13@31.815,29 31.561,28.746 31.561,28.561 34.352,25.77 34.352,20.707 33.61,19.964 U1.36@33.61,19.824
  other v2: 31.66,30.5
D19/A1: J2.12 U1.37 | length 13.4
  Top Layer w0.254: U1.37@33.11,19.824 33.11,19.993 33.8,20.684 v1(33.8,22.5)
  Bottom Layer w0.254: J2.12@29.275,29 29.275,28.9 29.04,28.665 29.04,27.66 29.5,27.2 32.7,27.2 33.8,26.1 v1(33.8,22.5)
  other v2: 29.12,30.5
D20/A2: J2.11 U1.38 | length 14.3
  Top Layer w0.254: J2.11 29.18,26.4 32.7,26.4 33.24,25.86 33.24,20.653 32.61,20.022 U1.38@32.61,19.824
  other v2: 26.58,30.5
D21/A3: J2.10 U1.39 | length 16.4
  Top Layer w0.254: U1.39 32.11,19.428 32.11,20.235 32.718,20.843 32.718,24.87 v1(32.688,24.9)
  Bottom Layer w0.254: J2.10@24.078,28.883 24.078,28.782 27.016,25.844 32.356,25.844 32.688,25.512 v1(32.688,24.9)
  other v2: 24.04,30.5
D22/A4: J2.9 U1.40 | length 17.7
  Top Layer w0.254: v1(26.7,25.104) 31.421,25.104 32.2,24.325 32.2,21.025 31.61,20.435 31.61,19.428 U1.40
  Bottom Layer w0.254: J2.9@21.538,28.782 24.57,25.75 26.054,25.75 v1(26.7,25.104)
  other v2: 21.5,30.5
D23/A5: J2.8 U1.41 | length 20.3
  Top Layer w0.254: U1.41 31.11,19.428 31.11,20.61 31.7,21.2 31.7,24.098 31.246,24.552 v1(31.193,24.552)
  Bottom Layer w0.254: J2.8 18.96,27.915 19.275,27.6 21.05,27.6 24.098,24.552 v1(31.193,24.552)
  other v2: 18.96,30.5
D+: R3.1 U1.4 | length 6
  Top Layer w0.254: R3.1 23.329,18.441 24.47,17.3 27.075,17.3 27.424,16.951 U1.4
D-: R4.1 U1.3 | length 6.5
  Top Layer w0.254: R4.1@23.377,20.1 23.38,20.1 23.544,19.936 23.544,19.723 25.267,18 27.286,18 27.835,17.451 U1.3
DN2: D1.1 J3.A7 J3.B7 R4.2 | length 20.3
  Top Layer w0.254: J3.A7 7.25,22.14 7.127,22.263 7.006,22.263 6.873,22.396 6.873,22.884 7.106,23.117 7.652,23.117 J3.B7 9.86,23.14 v1(10.6,22.4) 10.638,22.362 10.638,21.905 11.551,20.991 D1.1 ; v1(21.3,20.2) 21.911,20.2 21.926,20.215 R4.2@22.228,20.215
  Bottom Layer w0.254: v1(10.6,22.4) 11.1,22.9 18.6,22.9 v1(21.3,20.2)
DP2: D1.2 J3.A6 J3.B6 R3.2 | length 27.3
  Top Layer w0.254: v1(6.321,22.55) 6.359,22.512 6.359,22.117 6.835,21.64 8.1,21.64 8.223,21.763 8.344,21.763 8.477,21.896 8.477,22.384 8.344,22.517 8.223,22.517 8.1,22.64 J3.A6 ; D1.2 11.599,22.89 11.571,22.89 11.8,23.118 v1(11.8,23.9) ; v1(21.2,18.525) 22.233,18.525 R3.2@22.246,18.512
  Bottom Layer w0.254: v1(6.321,22.55) 7.332,22.55 7.833,23.052 8.762,23.052 ; v1(11.8,23.9) 9.61,23.9 8.762,23.052 ; v1(21.2,18.525) 21.238,18.563 21.238,18.759 21.254,18.776 21.254,19.233 20.239,20.248 11.566,20.248 8.762,23.052
GND: C1.2 C2.2 C3.2 C4.2 C5.2 C6.2 C7.2 C8.1 C9.2 C10.2 C11.1 C12.2 C13.1 C14.1 D1.3 D3.2 D4.3 J1.12 J2.1 J2.6 J3.A1_B12 J3.B1_A12 J3.SH1 J3.SH2 J3.SH3 J3.SH4 J4.2 PWR1.1 R1.2 R2.2 SW1.2 SW1.3 U1.5 U1.15 U1.23 U1.35 U1.43 U1.45 U2.8 U2.21 U3.2 U3.8 U3.9 Y1.2 Y1.4 Y2.2 Y2.4 | length 61.9
  Top Layer w0.254: J3.SH2 7.251,18.221 7.251,19.017 7.424,19.19 J3.B1_A12 ; J3.SH1 7.33,26.71 7.675,26.365 J3.A1_B12 ; v1(8,9.8) 10.32,9.8 J4.2 ; v1(8.9,17.8) 8.915,17.8 9.506,17.209 D3.2@9.606,17.209 ; v1(9.6,21) 9.6,21.94 D1.3 ; v1(10.7,17.7) 11.3,17.1 D4.3@12.1,17.1 ; R2.2@10.922,19.05 v1(11.684,19.05) ; R1.2@11.04,24.892 11.081,24.933 v1(11.863,24.933) 12.607,25.677 C6.2 ; U3.2 14,21.8 U3.9 13.8,21.55 14.5,20.85 U3.8 ; C7.2 14.525,17.073 v1(14.525,16.15) ; Y2.4 16.925,14.7 18.077,13.548 18.552,13.548 Y2.2 ; U2.8 17.9,16.271 17.888,16.283 17.888,17.988 U2.21 ; v1(19,21.6) 19.975,21.6 PWR1.1 ; 19.1,9 19.2,9 v1(20.5,10.3) ; 20.9,12.8 21.448,12.252 21.947,12.252 22.247,11.952 v1(22.3,11.952) ; C10.2@24.65,16.517 25.262,15.905 25.262,15.738 v1(25.3,15.7) ; SW1.3 25.15,8 v1(26.3,8) 26.3,7.947 26.527,7.72 26.527,6.473 26.8,6.2 SW1.2 ; v1(25.1,20.1) 25.1,19.323 C2.2 ; C5.2 26.379,13.244 26.379,12.774 26.5,12.653 v1(26.5,12.6) ; v1(28,23) C12.2@28.641,23 ; U1.5 U1.45@31.608,16.451 ; U1.43 30.108,17.951 v1(31.008,17.051) U1.45@31.608,16.451 ; v1(30.3,8.2) 30.3,9.046 C4.2 ; v1(30.625,23.6) 30.625,22.804 C9.2@30.638,22.791 ; U1.15 31.108,14.951 v1(32.108,15.951) ; Y1.4 33.048,9.352 33.595,9.352 33.707,9.24 v1(33.76,9.24) ; v1@33.722,9.203 33.872,9.203 34.168,8.907 34.168,8.707 34.975,7.9 Y1.2 ; U1.35 34.108,17.951 v1(33.208,17.051) v1(32.108,15.951) ; C11.1 34.75,5.9 v1(35.4,5.9) ; U1.23 34.608,13.451 v1(32.108,15.951) ; C3.2@35.7,22.6 v1(35.7,23.4) ; C8.1@37.558,7.438 37.581,7.438 38.003,7.016 38.003,6.797 v1(38.04,6.76) ; C1.2 37.979,12.144 37.979,11.943 38.162,11.76 38.162,11.338 v1(38.2,11.3) ; U1.45@31.608,16.451 v1(32.108,15.951)
  other v1: 29.908,13.751 31.008,13.751 32.108,13.751 33.208,13.751 34.308,13.751 17.8,13.9 29.908,14.851 31.008,14.851 32.108,14.851 33.208,14.851 34.308,14.851 29.908,15.951 31.008,15.951 33.208,15.951 34.308,15.951 29.908,17.051 32.108,17.051 34.308,17.051 17.35,17.45 18.45,17.45 29.908,18.151 31.008,18.151 32.108,18.151 33.208,18.151 34.308,18.151 17.35,18.55 18.45,18.55 13.25,21.05 14.25,21.05 13.25,22.05 14.25,22.05
  other v2: 13.88,0 1.18,30.5 13.88,30.5
MISO: J1.14 U1.11 U2.15 | length 37.9
  Top Layer w0.254: U2.15 19.852,19.002 20.699,19.002 v1(20.702,19.005) ; v1(23.114,9.398) 24.194,10.478 26.878,10.478 28.364,11.964 28.364,13.449 28.366,13.451 U1.11
  Bottom Layer w0.254: J1.14 8.8,1.8 10.2,3.2 16.7,3.2 19.853,6.353 19.853,8.453 21.956,10.556 ; v1(20.702,19.005) 20.664,18.967 20.664,18.77 20.648,18.754 20.648,18.296 20.971,17.973 21.033,17.973 21.4,17.606 21.4,11.112 21.956,10.556 ; v1(23.114,9.398) 21.956,10.556
  other v2: 8.8,0
MOSI: J1.16 U1.10 U2.14 | length 43.6
  Top Layer w0.254: v2(3.72,0) J1.16 3.72,1.545 J1.16@3.75,1.575 ; J1.16@4.075,1.55 5.393,2.868 11.582,2.868 13.014,4.3 19.286,4.3 20.6,5.614 20.6,9.4 21.904,10.704 23.354,10.704 23.68,11.03 v1(24.384,11.03) 26.53,11.03 27.8,12.3 27.8,13.516 28.087,13.803 28.089,13.803 U1.10@28.235,13.949 ; U2.14 19.852,18.498 20.428,18.498 20.822,18.104 20.84,18.104 20.971,17.973 21.16,17.973 23.948,15.185 23.948,12.6 v1(24.4,12.148)
  Bottom Layer w0.254: v1(24.384,11.03) 24.392,11.038 24.392,12.14 v1(24.4,12.148)
NetC10_1: C10.1 U1.6 | length 2.5
  Top Layer w0.254: C10.1@26.4,16.478 27.622,16.478 28.149,15.951 U1.6
NetC12_1: C12.1 FB1.2 U1.44 | length 4.1
  Top Layer w0.254: FB1.2 28.551,21.2 29.608,20.143 U1.44
NetJ3_A5: J3.A5 R1.1 | length 2.4
  Top Layer w0.254: J3.A5 7.698,23.663 8.305,23.663 9.208,24.566 9.234,24.566 9.534,24.866 R1.1
NetJ3_B5: J3.B5 R2.1 | length 2.7
  Top Layer w0.254: J3.B5 8.1,20.64 8.223,20.517 8.344,20.517 8.477,20.384 8.477,20.133 9.534,19.076 R2.1
NetJ5_2: J5.2 R10.2 | length 4
  Top Layer w0.254: J5.2 4.302,15.7 4.702,16.1 4.94,16.1 5.69,16.85 R10.2
NetPWR1_2: PWR1.2 R5.2 | length 1.5
  Top Layer w0.254: PWR1.2 R5.2
NetR7_2: "RX CAN1.1" R7.2 | length 1.5
  Top Layer w0.254: 16,23.2 R7.2
NetR8_2: "TX CAN1.2" R8.2 | length 1.5
  Top Layer w0.254: 18,23.2 R8.2@18,24.75
NetR9_2: R9.2 U2.17 | length 7.1
  Top Layer w0.254: U2.17 18.4,20.171 18.548,20.319 18.548,20.321 18.928,20.701 20.247,20.701 21.671,22.125 21.671,24.421 21.973,24.723 R9.2
PB0: J2.3 U1.8 | length 32.6
  Top Layer w0.254: v1(27.5,14.75) 27.553,14.75 27.752,14.949 U1.8@28.235,14.949
  Bottom Layer w0.254: J2.3@6.415,29 6.488,28.927 6.488,28.763 7.564,27.687 9.89,27.687 13.177,24.4 18.475,24.4 23,19.875 23,13.9 23.6,13.3 25.769,13.3 27.185,14.716 27.466,14.716 v1(27.5,14.75)
  other v2: 6.26,30.5
PD5: J1.6 U1.22 | length 18.5
  Top Layer w0.254: U1.22 34.608,12.307 34.61,12.305 36.495,12.305 v1(36.5,12.3)
  Bottom Layer w0.254: J1.6 29.12,2.12 30.9,3.9 32,3.9 32.8,4.7 35.2,4.7 36,5.5 37.125,6.625 37.125,11.622 36.5,12.247 v1(36.5,12.3)
  other v2: 29.12,0
PE2: J2.14 U1.33 | length 13.4
  Top Layer w0.254: J2.14 34.2,28.6 38,24.8 38,20.4 36.051,18.451 U1.33
  other v2: 34.2,30.5
RESET: D2.2 J1.13 R6.1 SW1.1 U1.13 | length 24.8
  Top Layer w0.254: J1.13@11.708,1.512 13.703,3.508 19.433,3.508 21.312,5.388 21.675,5.75 22.025,6.1 23.1,6.1 23.881,6.1 24.173,6.392 24.173,8.394 24.71,8.931 27.747,8.931 27.896,9.08 27.896,9.225 27.948,9.277 R6.1@28.152,9.277 ; R6.1@27.94,9.541 28.023,9.624 28.023,9.993 30.106,12.076 30.106,12.474 U1.13
  other v2: 11.34,0
RX: J1.8 U1.20 | length 18.4
  Top Layer w0.254: U1.20 33.608,12.042 33.623,12.027 33.623,11.877 34.5,11 v1(35.5,11)
  Bottom Layer w0.254: J1.8@24.395,1.5 24.429,1.534 24.434,1.534 28.635,5.735 31.035,5.735 35.5,10.2 v1(35.5,11)
  other v2: 24.04,0
RXCAN: "RX CAN1.2" U2.20 U3.4 | length 10.2
  Top Layer w0.254: v1(12.5,19.6) 12.5,22.204 13,22.704 U3.4 ; v1(15.3,19.6) 15.353,19.6 15.703,19.95 U2.20 ; 16,21.6 16.9,20.7 U2.20@16.9,19.973
  Bottom Layer w0.254: v1(12.5,19.6) 12.553,19.6 12.655,19.702 15.145,19.702 15.247,19.6 v1(15.3,19.6)
SCK: J1.15 U1.9 U2.12 | length 36.8
  Top Layer w0.254: U2.12 19.852,17.498 20.727,17.498 v1(20.763,17.462) ; v1(20.5,11.4) 22.581,11.4 22.763,11.582 26.357,11.582 27.3,12.525 27.3,13.6 28.151,14.451 U1.9
  Bottom Layer w0.254: J1.15@6.615,1.835 8.83,4.05 16.3,4.05 18.375,6.125 18.375,9.275 v1(20.5,11.4) 20.5,16.729 20.726,16.954 20.726,17.424 v1(20.763,17.462)
  other v2: 6.26,0
TX: J1.7 U1.21 | length 18.3
  Top Layer w0.254: U1.21 34.108,12.017 34.55,11.575 35.899,11.575 36.077,11.753 v1(36.13,11.753)
  Bottom Layer w0.254: J1.7 26.58,2.08 29.2,4.7 31.5,4.7 36.13,9.33 v1(36.13,11.753)
  other v2: 26.58,0
TXCAN: "TX CAN1.1" U2.19 U3.1 | length 6
  Top Layer w0.254: U3.1 14.506,22.994 14.506,22.979 15.185,22.3 17,22.3 17.4,21.9 17.4,21.45 ; U2.19 17.4,21.45 ; 18,21.6 17.85,21.45 17.4,21.45
XTAL1: C8.2 U1.17 Y1.3 | length 7.5
  Top Layer w0.254: U1.17 32.108,10.872 32.572,10.407 34.068,10.407 34.975,9.5 Y1.3 ; Y1.3@35.15,9.55 35.448,9.252 36.268,9.252 36.308,9.212 37.332,9.212
XTAL2: C11.2 U1.16 Y1.1 | length 7.4
  Top Layer w0.254: U1.16 31.608,12.08 31.604,12.076 31.604,9.471 31.891,9.184 31.891,8.784 32.775,7.9 33,7.9 33,5.75
XTAL_CAN_1: C13.2 U2.7 Y2.3 | length 4.2
  Top Layer w0.254: U2.7 17.402,16.048 17.402,15.825 17.754,15.473 18.102,15.473 18.875,14.7 Y2.3 20.8,14.7 20.9,14.8
XTAL_CAN_2: C14.2 U2.6 Y2.1 | length 7.3
  Top Layer w0.254: U2.6 16.9,15.888 16.898,15.886 16.39,15.886 15.873,15.369 15.873,13.902 16.675,13.1 Y2.1 16.925,13.1 17.373,12.652 17.373,12.627 19,11 19.1,11
Zworka_high: D4.2 J4.3 J5.1 U3.7 | length 30.2
  Top Layer w0.254: v1(10.675,13.175) 12.275,11.575 12.275,9.425 13.738,7.962 14.063,7.962 14.252,7.773 14.252,7.458 14.76,6.95 J4.3 ; U3.7 14,19.325 13.925,19.25 13.925,19.248 13.7,19.023 13.7,16.2 13.05,15.55 13.05,15.05 v1(14.3,13.8)
  Bottom Layer w0.254: J5.1 3.06,14.1 8.375,14.1 9.338,13.137 10.637,13.137 11.3,13.8 v1(14.3,13.8) ; J5.1@1.5,15.741 J5.1@1.5,16.1
Zworka_low: D4.1 J4.4 R10.1 U3.6 | length 16.7
  Top Layer w0.254: R10.1 7.677,15.527 10.773,15.527 D4.1@11.15,15.15 ; U3.6@13.498,19.802 13.352,19.656 13.352,19.654 13,19.302 13,16.5 12.3,15.8 11.8,15.8 D4.1@11.15,15.15 ; J4.4 15.233,10.083 15.233,10.617 12.3,13.55 12.3,13.9 11.15,15.05 11.15,15.1 D4.1@11.15,15.15
pads on no net: J3. J3.A8 J3.B8 J4.5 J4.6 U2.1 U2.4 U2.9 U2.10 U2.13 U3.5

## Polygon pours and split planes (outlines as drawn)
no net on Bottom Layer "NONET_L-01_P-001" (solid, pour order 20): 13.075,4.473 cw(c13.075,8.773) 8.775,8.773 cw(c13.075,8.773) 13.075,13.073 cw(c13.075,8.773) 17.375,8.773 cw(c13.075,8.773)
GND on GND "GND_L02_P000" (solid, pour order 0): 0,0 0,30.5 43,30.5 43,0
+5 on PWR "+5_L03_P019" (solid, pour order 19): 0,30.5 0,0 43,0 43,30.5 0.1,30.5

## Silkscreen, mask and mechanical layers (free items; w line width, h text height)
Top Overlay:
  text "CSCAN / .D10" at 39.642,28.125 h0.64 r180
  text "GND" at 2.035,28.098 h0.64 r180
  text "+5" at 4.352,28.098 h0.64 r180
  text "17/SS" at 7.543,28.007 h0.64 r180
  text "+5" at 9.402,27.973 h0.64 r180
  text "7" at 11.487,27.973 h0.64 r180
  text "GND" at 14.685,27.973 h0.64 r180
  text "AREF" at 17.469,27.973 h0.64 r180
  text "A5" at 19.528,27.973 h0.64 r180
  text "A4" at 22.018,27.973 h0.64 r180
  text "A3" at 24.578,27.973 h0.64 r180
  text "A2" at 27.103,27.973 h0.64 r180
  text "A1" at 29.541,27.973 h0.64 r180
  text "A0" at 32.178,27.973 h0.64 r180
  text "!HBW" at 35.184,27.973 h0.64 r180
  text ".13" at 39.869,27.973 h0.64 r180
  text ".5" at 42.186,27.973 h0.64 r180
  text "+5" at 0.573,2.527 h0.64
  text "MOSI" at 2.844,2.527 h0.64
  text "SCK" at 5.49,2.527 h0.64
  text "MISO" at 7.926,2.527 h0.64
  text "RST" at 10.648,2.527 h0.64
  text "GND" at 13.09,2.527 h0.64
  text "2" at 16.263,2.527 h0.64
  text ".11" at 18.517,2.527 h0.64
  text ".3" at 21.189,2.527 h0.64
  text "0" at 23.838,2.527 h0.64
  text "1" at 26.474,2.527 h0.64
  text "TXLED" at 27.916,2.527 h0.64
  text "4" at 31.448,2.527 h0.64
  text "12" at 33.731,2.527 h0.64
  text ".6" at 36.504,2.527 h0.64
  text "8" at 39.113,2.527 h0.64
  text ".9" at 41.579,2.527 h0.64
Bottom Overlay:
  drawing of 24 lines, arcs and shapes, not listed
Bottom Solder:
  drawing of 13 lines, arcs and shapes, not listed